# Altium PCB CH32H417QEU-R1.PcbDoc (part 1 of 6)
Units mm, origin at the board's own origin, x right, y up, seen from the top; angles counter-clockwise.
Board outline 125 x 85 mm, 4 copper layers (Top Layer, Layer 1, Layer 2, Bottom Layer), stack 0.603 mm thick; 271 components, 256 nets, 1068 pads, 903 vias.
Unrouted connection lines stored in the file: 143.
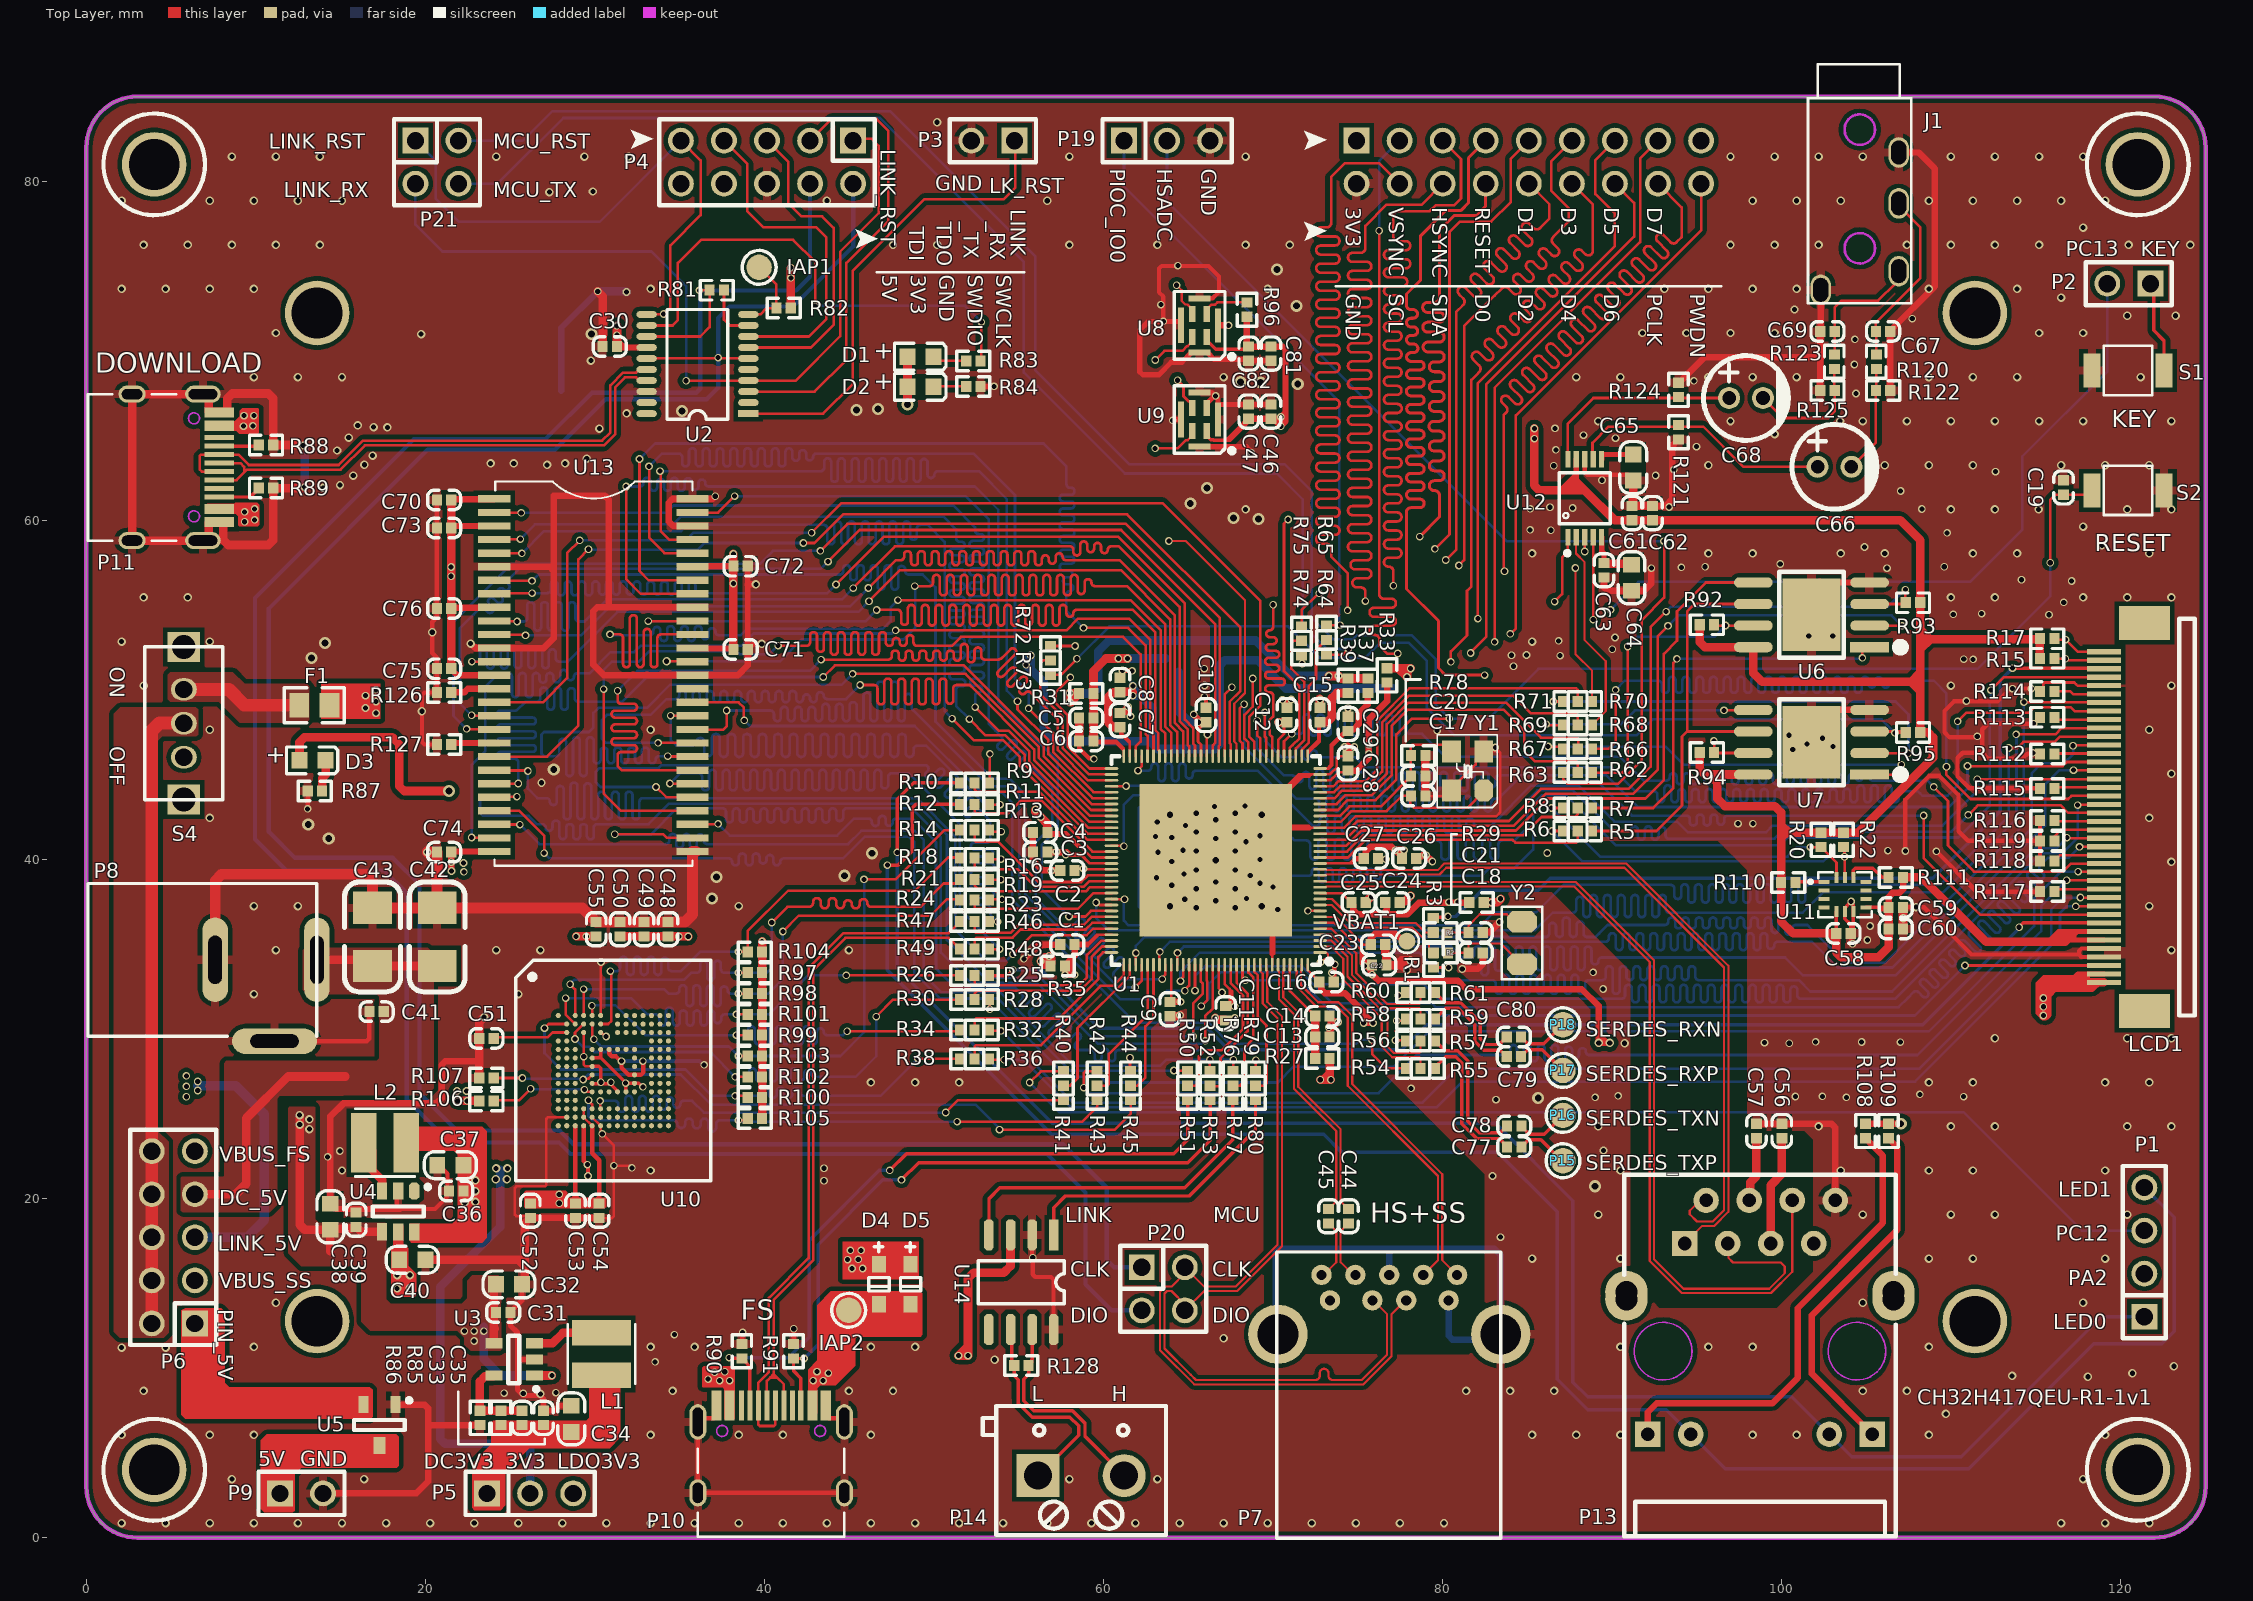
[diagram p0: Top Layer view]
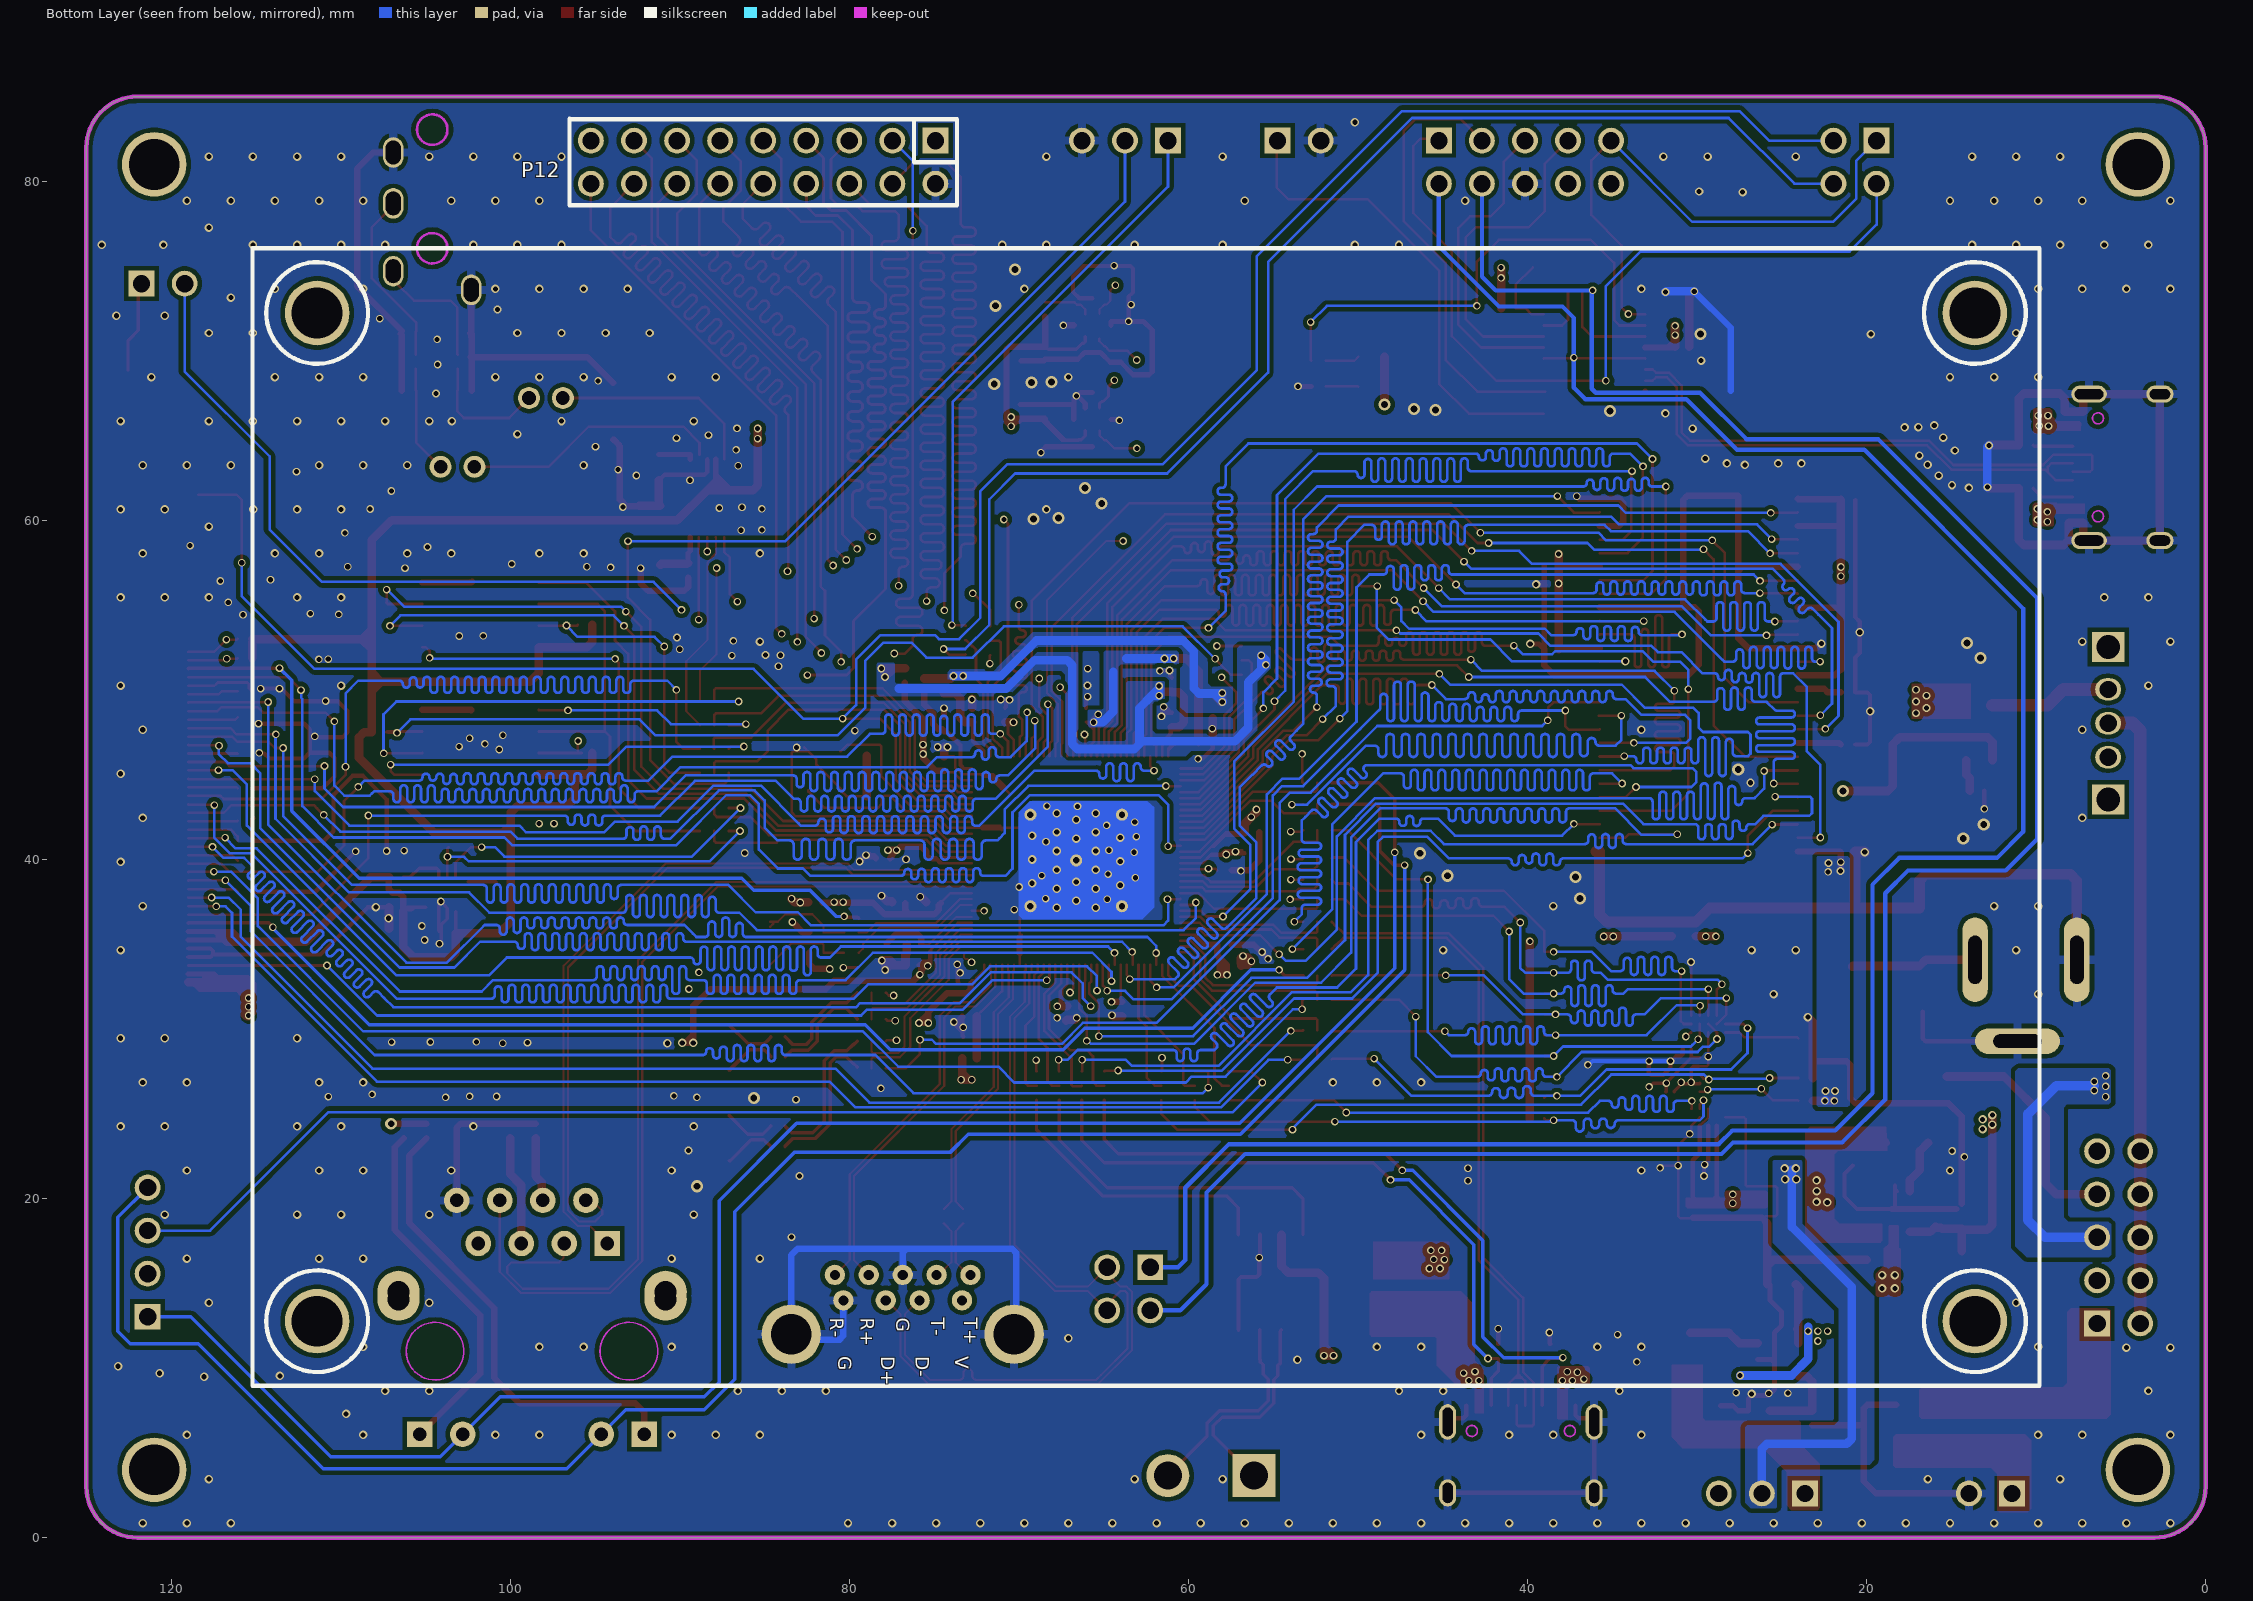
[diagram p1: Bottom Layer view, seen from below]
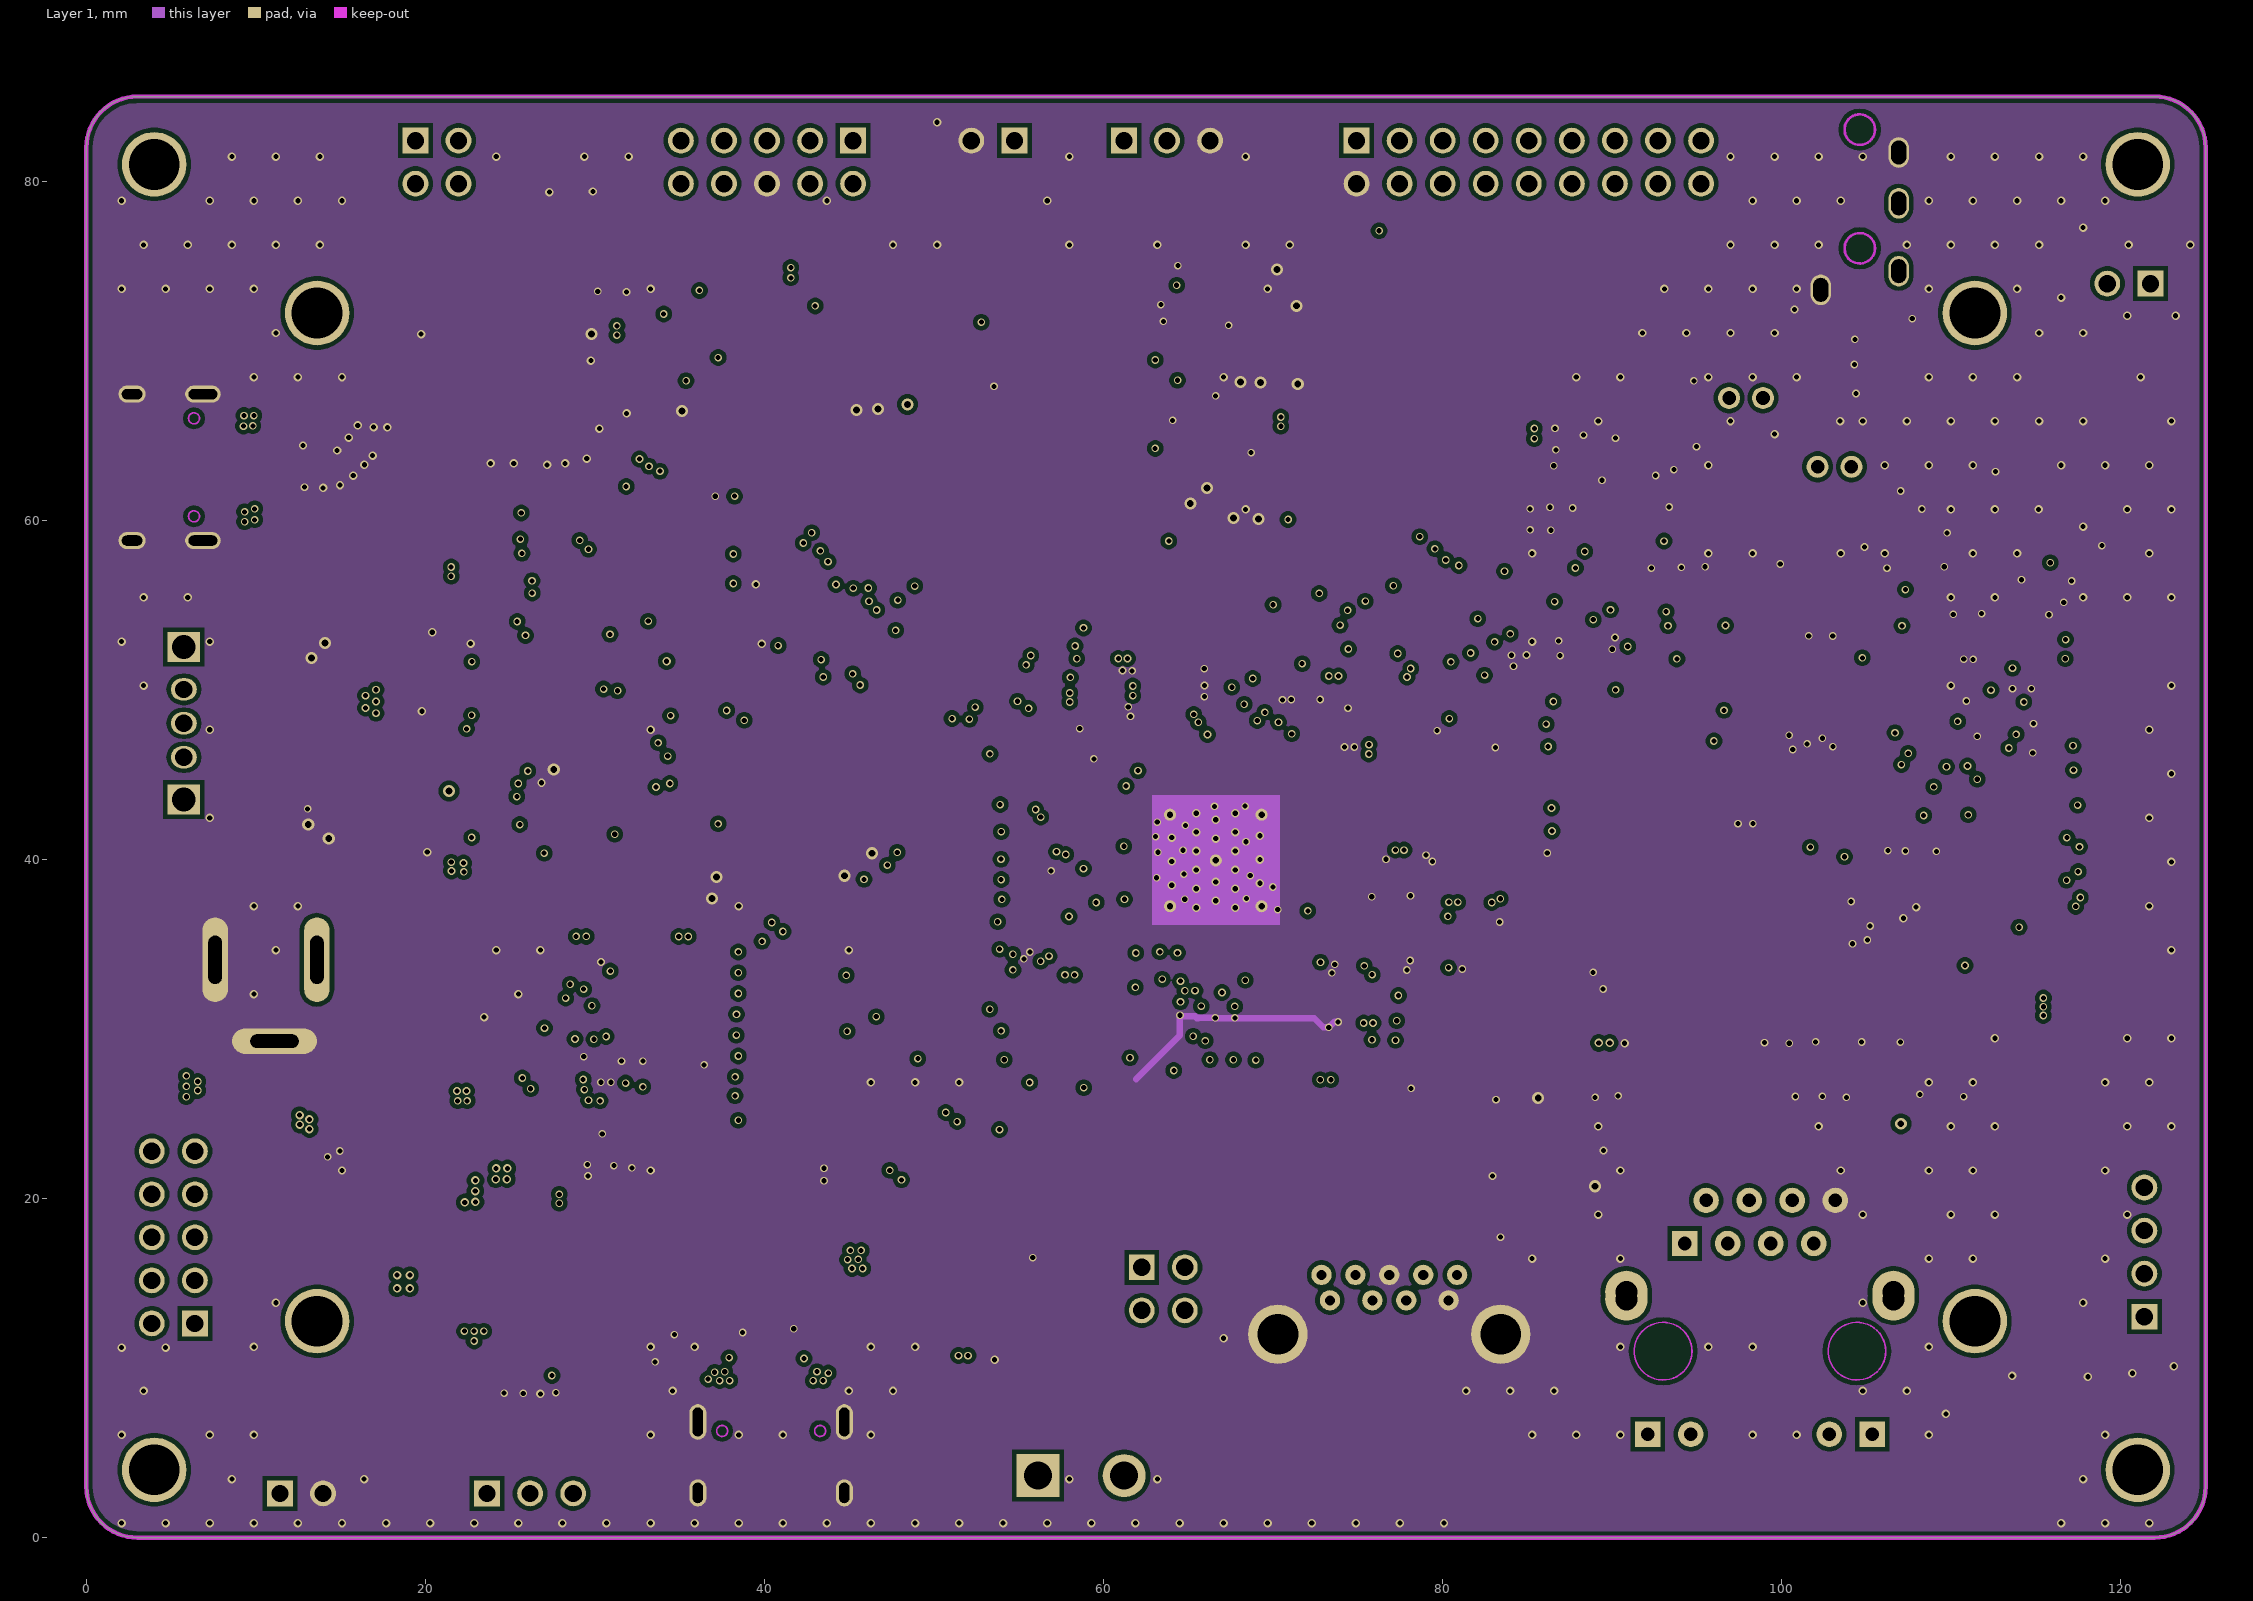
[diagram p2: Layer 1]
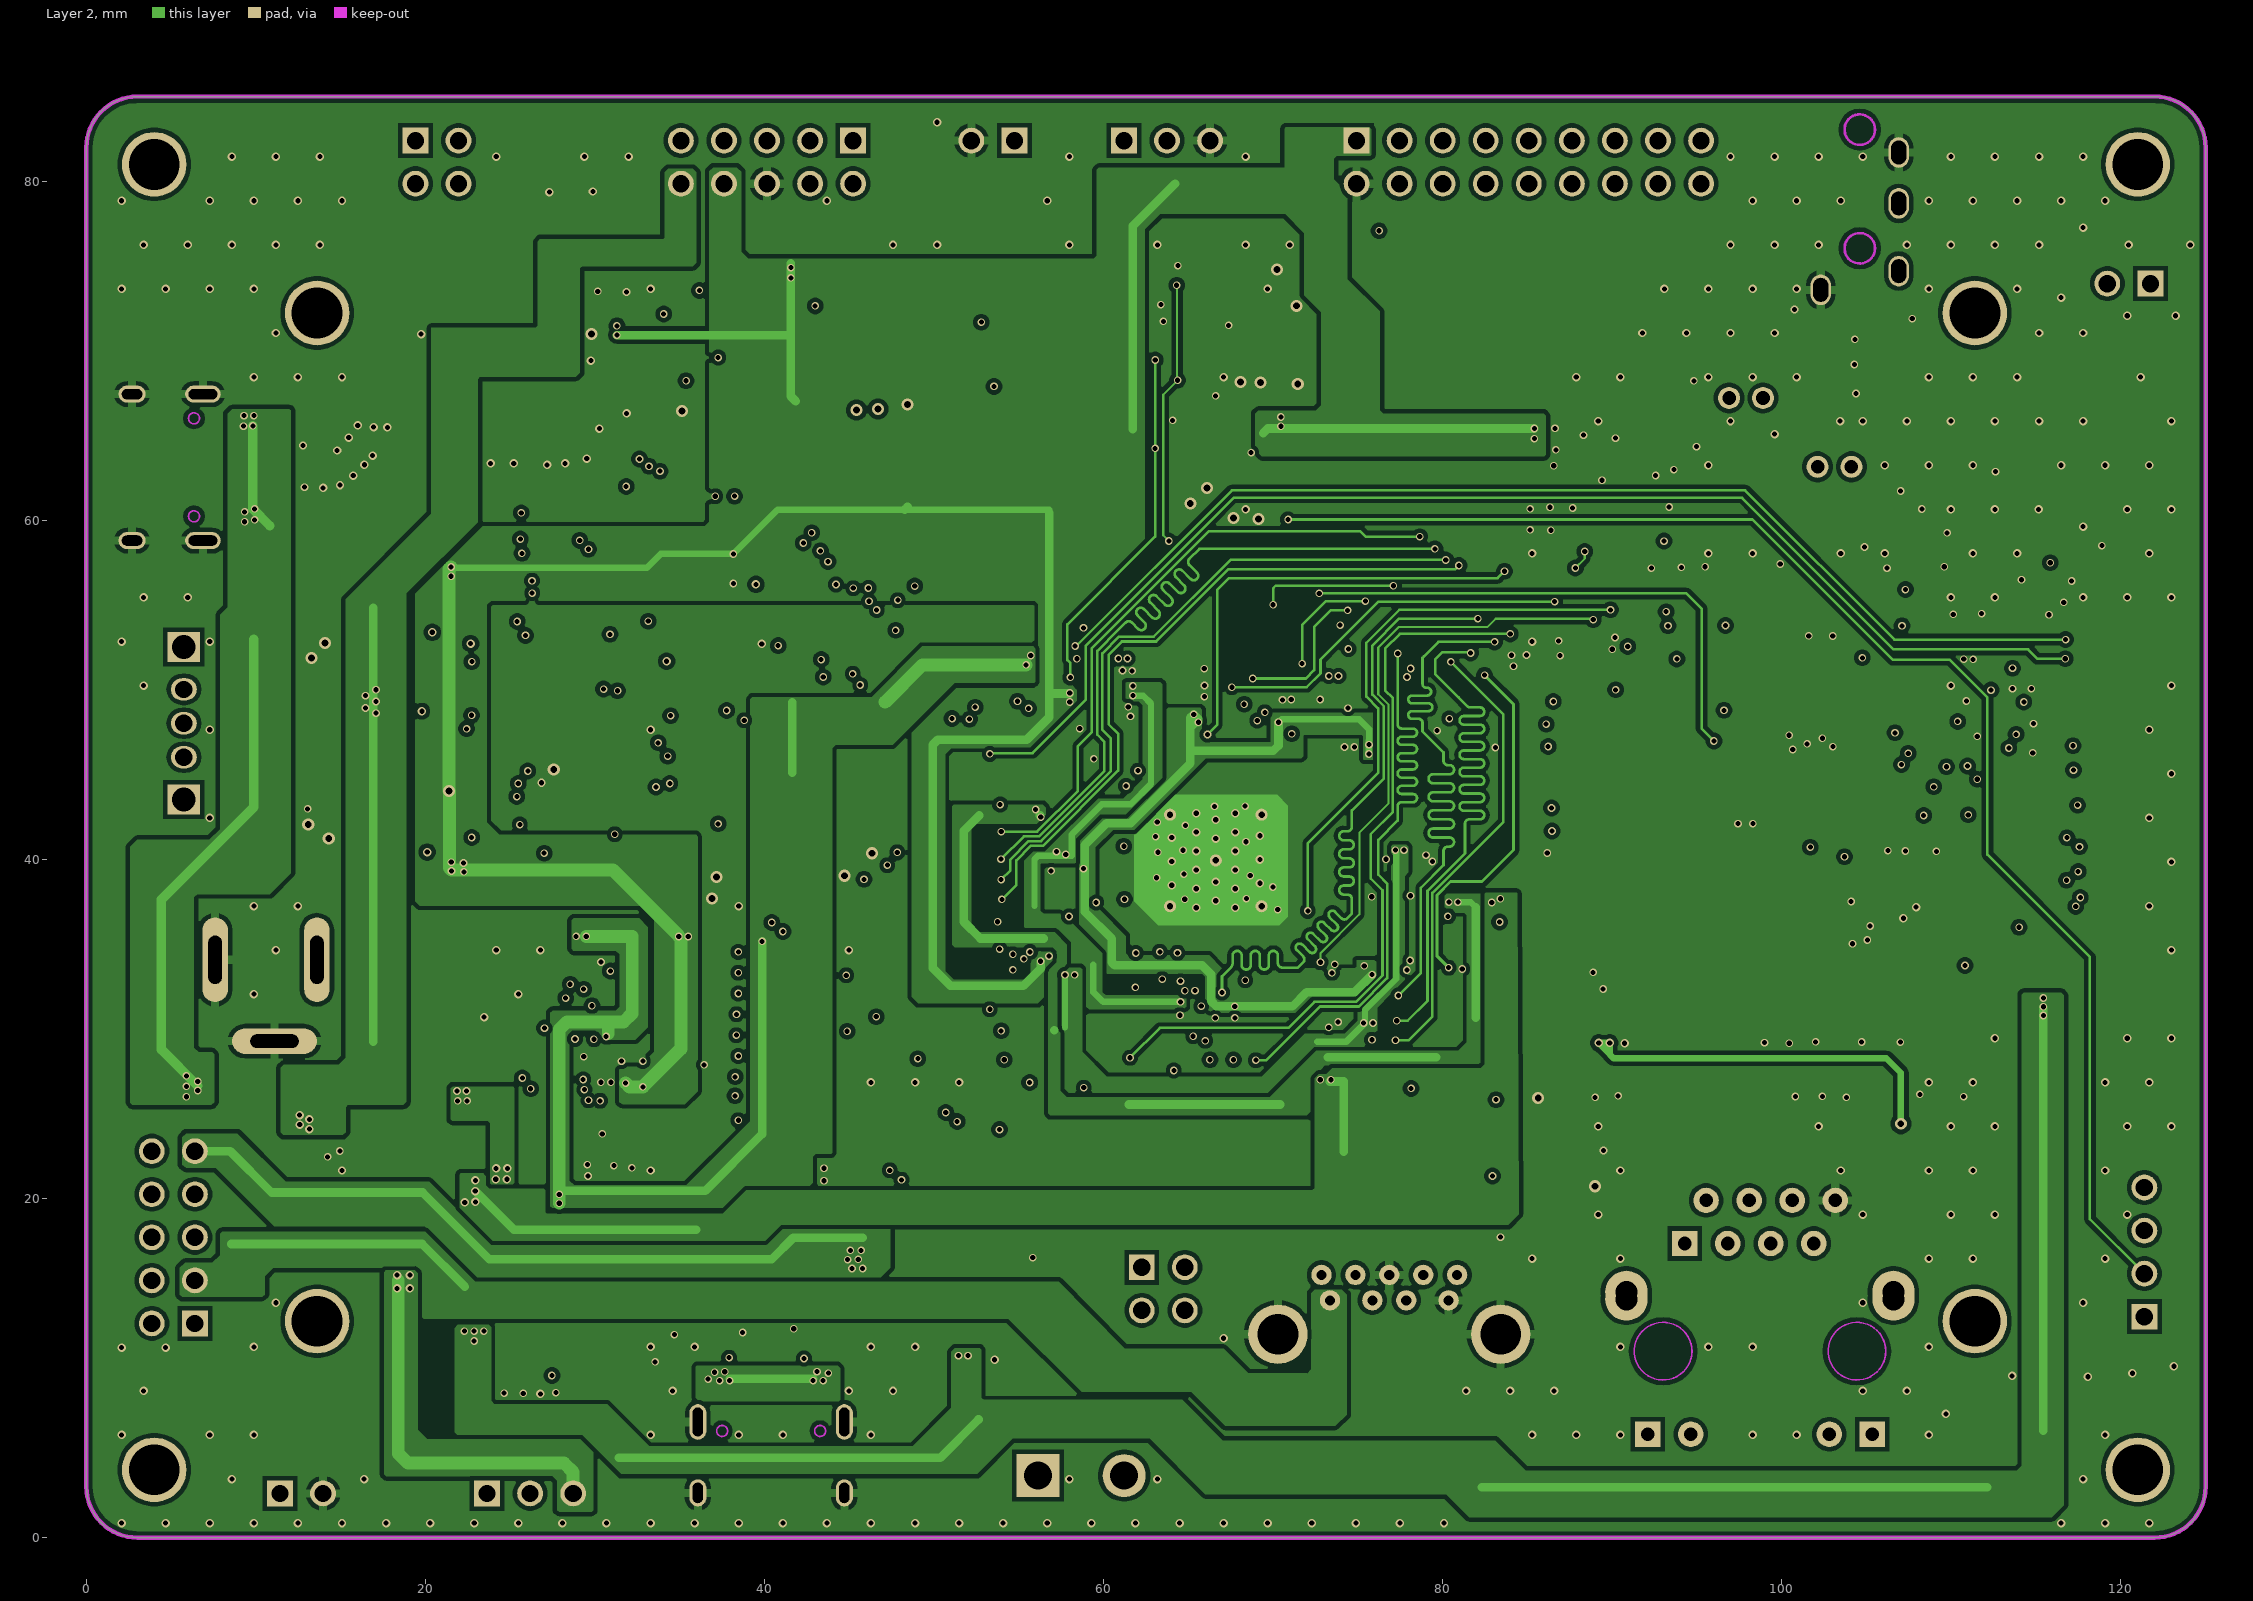
[diagram p3: Layer 2]

## Layer stack, top to bottom
Top Solder: solder mask 0.0102, Solder Resist, Dk 3.5
Top Layer: signal copper 0.0356
Dielectric 2: prepreg 0.0711, PP-006, Dk 4.1
Layer 1: signal copper 0.035
Dielectric 1: dielectric 0.32, FR-4, Dk 4.8
Layer 2: signal copper 0.035
Dielectric 3: prepreg 0.0711, PP-006, Dk 4.1
Bottom Layer: signal copper 0.0356
Bottom Solder: solder mask 0.0102, Solder Resist, Dk 3.5

## Board outline
3,0 cw(c3,3) 0,3 0,82 cw(c3,82) 3,85 122,85 cw(c122,82) 125,82 125,3 cw(c122,3) 122,0

## Design rules (kind name [scope] priority, off if disabled: settings)
Clearance Clearance_1 [InPolygon] p1: gap=0.254 ignorepadtopadclearanceinfootprint=FALSE except(0: Arc-Hole Track-Hole SMDPad-Hole THPad-Hole Via-Hole Fill-Hole Poly-Hole Region-Hole Text-Hole)
Clearance [All] p2: gap=0.127 ignorepadtopadclearanceinfootprint=FALSE except(0: Arc-Hole Track-Hole SMDPad-Hole THPad-Hole Via-Hole Fill-Hole Poly-Hole Region-Hole Text-Hole; 0.152: Arc-THPad Arc-Via Track-THPad Track-Via Via-Fill Via-Poly Via-Region)
ComponentClearance [All] p1 off: gap=0.254 collisioncheckmode=3 verticalgap=0.254 showdistances=FALSE
DiffPairsRouting [All] p1: maxlimit=0.254 minlimit=0.127 mostfreqgap=0.203 toplayer_minwidth=0.102 toplayer_maxwidth=0.381 toplayer_prefwidth=0.203 midlayer1_minwidth=0.102 midlayer1_maxwidth=0.381 midlayer1_prefwidth=0.203 midlayer2_minwidth=0.102 midlayer2_maxwidth=0.381 midlayer2_prefwidth=0.203 bottomlayer_minwidth=0.102 bottomlayer_maxwidth=0.381 bottomlayer_prefwidth=0.203 maxuncoupledlength=12.7
HoleToHoleClearance [All] p1: gap=0.203 allowstackedmicrovias=TRUE
MinimumAnnularRing [All] p1: minimumring=0.07
MinimumSolderMaskSliver [All] p1 off: minsoldermaskwidth=0.254
PlaneConnect [All] p1: planeconnectstyle=Direct reliefexpansion=0.508 reliefentries=4 reliefconductorwidth=0.254 reliefairgap=0.254
PolygonConnect PolygonConnect_2 [InPolygonClass('New Class')] p1: connectstyle=Direct reliefconductorwidth=0.254 reliefentries=4 polygonreliefangle="90 Angle" airgapwidth=0.254
PolygonConnect PolygonConnect_1 [IsVia] p2: connectstyle=Direct reliefconductorwidth=0.254 reliefentries=4 polygonreliefangle="90 Angle" airgapwidth=0.254
PolygonConnect [All] p3: connectstyle=Relief reliefconductorwidth=0.508 reliefentries=4 polygonreliefangle="90 Angle" airgapwidth=0.254
RoutingVias [All] p1: holewidth=0.2 width=0.45 viastyle="Through Hole" minholewidth=0.15 minwidth=0.3 maxholewidth=0.711 maxwidth=1.27
SilkToSilkClearance [All] p1 off: silktosilkclearance=0.254
SilkToSolderMaskClearance [IsPad] p1 off: minsilkscreentomaskgap=0.254 clearancetoexposedcopper=TRUE
SolderMaskExpansion [All] p1: expansion=0.051 istentingtop=FALSE
Width [All] p1: maxlimit=2.54 minlimit=0.102 preferedwidth=0.127
23 further rules are at their usual default settings.

## Classes and differential pairs
component class CAN: P14 R128 U14
component class DFSDM: C46 C47 C81 C82 R96 U8 U9
component class DVP: P12
component class eMMC: C48 C49 C50 C51 C52 C53 C54 C55 R97 R98 R99 R100 R101 R102 R103 R104 R105 R106 R107 U10
component class ETH: C56 C57 P13 R108 R109
component class GPIO_OUT: C77 C78 C79 C80 P15 P16 P17 P18 P19
component class I3C: C58 C59 C60 R110 R111 U11
component class LCD: LCD1 R112 R113 R114 R115 R116 R117 R118 R119
component class Link: C30 D1 D2 IAP1 P3 P4 P20 P21 R81 R82 R83 R84 U2
component class POWER: C31 C32 C33 C34 C35 C36 C37 C38 C39 C40 C41 C42 C43 C44 C45 D3 D4 D5 F1 IAP2 L1 L2 P5 P6 P7 P8 P9 P10 P11 R85 R86 R87 R88 R89 R90 R91 S4 U3 U4 U5
component class QSPI: R92 R93 R94 R95 U6 U7
component class SAI: C61 C62 C63 C64 C65 C66 C67 C68 C69 J1 R120 R121 R122 R123 R124 R125 U12
component class SDRAM: C70 C71 C72 C73 C74 C75 C76 R126 R127 U13
component class U_MCU: C1 C2 C3 C4 C5 C6 C7 C8 C9 C10 C11 C12 C13 C14 C15 C16 C17 C18 C19 C20 C21 C22 C23 C24 C25 C26 C27 C28 C29 P1 P2 R1 R2 R3 R4 R5 R6 R7 R8 R9 R10 R11 R12 R13 R14 R15 R16 R17 R18 R19 R20 R21 R22 R23 R24 R25 R26 R27 R28 R29 R30 R31 R32 R33 R34 R35 R36 R37 R38 R39 R40 R41 R42 R43 R44 R45 R46 R47 R48 R49 R50 R51 R52 R53 R54 R55 R56 R57 R58 R59 R60 R61 R62 R63 R64 R65 R66 R67 R68 R69 R70 R71 R72 R73 R74 R75 R76 R77 R78 R79 R80 S1 S2 U1 VBAT1 Y1 Y2
polygon class "New Class": 1V2 3V3 5V DC_5V GND LDO_3V3 Link_5V NetF1_2 NetP6_2 VBUS_5V VBUS_CC VBUS_FS VDD33 VDDIO VDDK VIO_1.8
differential pair NetC45_NetC44: +NetC45_1 -NetC44_1
differential pair USBSS_TX: +USBSS_TXP -USBSS_TXN
differential pair USBSS_RX: +USBSS_RXN -USBSS_RXP
differential pair NewDifferentialPair1: +DIO -CLK
differential pair MDIR: +MDIRP -MDIRN
differential pair MDIT: +MDITN -MDITP
differential pair USB: +USB_P -USB_N
differential pair OTG_FS_D: +OTG_FS_DM -OTG_FS_DP

## Components (designator, comment, footprint, x,y, rotation, side; value= is the part's Value field where it differs from the comment)
C1 "0.1uF" 0402_C 58.288,34.977 r270 top
C2 "0.1uF" 0402_C 58.288,39.352 r270 top
C3 "0.1uF" 0402_C 56.682,40.433 r270 top
C4 "0.1uF" 0402_C 56.682,41.603 r270 top
C5 "10uF" 0402_C 58.554,48.34 r90 top
C6 "0.1uF" 0402_C 59.404,46.987 r270 top
C7 "0.1uF" 0402_C 60.971,47.797 r180 top
C8 "2.2uF" 0402_C 60.971,50.715 r0 top
C9 "0.1uF" 0402_C 63.903,31.598 r0 top
C10 "0.1uF" 0402_C 66.035,48.096 r180 top
C11 "0.1uF" 0402_C 67.204,30.501 r180 top
C12 "0.1uF" 0402_C 70.813,48.946 r0 top
C13 "2.2uF" 0402_C 73.329,29.519 r270 top
C14 "0.1uF" 0402_C 73.329,30.753 r270 top
C15 "0.1uF" 0402_C 72.75,48.946 r0 top
C16 "0.1uF" 0402_C 73.569,32.762 r270 top
C17 "18pF" 0402_C 78.977,43.735 r270 top
C18 "NC(12pF)" 0402_C 81.518,34.494 r90 top
C19 "0.1uF" 0402_C 116.623,62.366 r0 top
C20 "18pF" 0402_C 78.977,44.923 r270 top
C21 "NC(12pF)" 0402_C 81.518,35.695 r90 top
C22 "0.1uF" 0402_C 76.684,33.763 r270 top
C23 "0.1uF" 0402_C 76.608,34.972 r270 top
C24 "0.1uF" 0402_C 77.464,37.469 r270 top
C25 "2.2uF" 0402_C 74.614,37.469 r90 top
C26 "10uF" 0402_C 78.445,40.065 r270 top
C27 "0.1uF" 0402_C 76.191,40.065 r270 top
C28 "0.1uF" 0402_C 74.412,45.24 r180 top
C29 "0.1uF" 0402_C 74.412,48.42 r0 top
C30 "0.1uF" 0402_C 31.299,70.259 r270 top
C31 "NC(0.1uF)" 0402_C 25.007,13.285 r270 top
C32 "NC(10uF)" 0603_C 25.697,14.936 r180 top
C33 "NC(20pF)" 0402_C 25.705,6.633 r180 top
C34 "NC(10uF)" 0603_C 28.603,6.236 r90 top
C35 "NC(0.1uF)" 0402_C 26.952,6.633 r180 top
C36 "0.1uF" 0402_C 21.39,20.444 r90 top
C37 "10uF" 0603_C 20.7,21.968 r0 top
C38 "10uF" 0603_C 14.392,19.697 r270 top
C39 "0.1uF" 0402_C 15.916,19.173 r0 top
C40 "10uF" 0603_C 19.997,16.389 r180 top
C41 "NC(100nF)" 0402_C 16.689,31.024 r90 top
C42 "NC(33uF)" 3528_C 20.69,37.145 r90 top
C43 "NC(33uF)" 3528_C 16.88,37.145 r90 top
C44 "0.1uF" 0402_C 74.435,18.532 r180 top
C45 "0.1uF" 0402_C 73.267,18.532 r180 top
C46 "NC(1uF)" 0402_C 69.869,66.844 r0 top
C47 "NC(100nF)" 0402_C 68.56,66.844 r0 top
C48 "NC(4.7uF)" 0402_C 34.312,36.316 r0 top
C49 "NC(4.7uF)" 0402_C 32.899,35.466 r180 top
C50 "NC(0.1uF)" 0402_C 31.485,35.466 r180 top
C51 "NC(0.1uF)" 0402_C 23.173,29.45 r90 top
C52 "NC(4.7uF)" 0402_C 26.182,18.856 r180 top
C53 "NC(0.1uF)" 0402_C 28.849,19.706 r0 top
C54 "NC(0.1uF)" 0402_C 30.246,19.706 r0 top
C55 "NC(0.1uF)" 0402_C 30.071,35.466 r180 top
C56 "0.1uF" 0402_C 100.002,24.409 r0 top
C57 "0.1uF" 0402_C 98.503,24.409 r0 top
C58 "NC(10nF)" 0402_C 104.067,35.642 r270 top
C59 "NC(100nF)" 0402_C 107.154,37.175 r270 top
C60 "NC(2.2uF)" 0402_C 107.154,35.905 r270 top
C61 "NC(1uF)" 0402_C 91.166,60.858 r0 top
C62 "NC(100nF)" 0402_C 92.374,60.858 r0 top
C63 "NC(100nF)" 0402_C 89.506,56.631 r180 top
C64 "NC(10uF)" 0603_C 91.138,55.849 r90 top
C65 "NC(10uF)" 0603_C 91.242,62.351 r90 top
C66 "NC(3.3uF)" CAP-TH_BD5.0-P2.00-D0.8-FD 103.111,63.162 r0 top
C67 "NC(2.7nF)" 0402_C 106.399,71.153 r270 top
C68 "NC(3.3uF)" CAP-TH_BD5.0-P2.00-D0.8-FD 97.892,67.219 r0 top
C69 "NC(2.7nF)" 0402_C 102.272,71.153 r90 top
C70 "NC(104)" 0402_C 20.674,61.208 r90 top
C71 "NC(104)" 0402_C 39.011,52.394 r270 top
C72 "NC(104)" 0402_C 39.011,57.296 r270 top
C73 "NC(104)" 0402_C 20.674,59.557 r90 top
C74 "NC(104)" 0402_C 20.674,40.431 r90 top
C75 "NC(104)" 0402_C 20.674,51.251 r90 top
C76 "NC(104)" 0402_C 20.674,54.807 r90 top
C77 "NC(0.1uF)" 0402_C 83.793,23.053 r90 top
C78 "NC(0.1uF)" 0402_C 83.793,24.286 r90 top
C79 "NC(0.1uF)" 0402_C 83.776,28.367 r90 top
C80 "NC(0.1uF)" 0402_C 83.776,29.533 r90 top
C81 "NC(1uF)" 0402_C 69.869,69.415 r180 top
C82 "NC(100nF)" 0402_C 68.56,69.415 r180 top
D1 "BLUE" 0603+ 48.431,69.655 r0 top
D2 "RED" 0603+ 48.431,67.875 r0 top
D3 "RED" 0603+ 12.567,45.845 r0 top
D4 "NC(Diode)" SOD-323 46.752,16.125 r270 top
D5 "NC(Diode)" SOD-323 48.621,16.125 r270 top
F1 "1A" 0805 14.339,49.096 r180 top
IAP1 "Testpoint" TESTPOINT1 39.679,74.927 r0 top
IAP2 "VBUS_CC" TESTPOINT1 44.962,13.409 r90 top
J1 "NC(Phone Jack)" 3.5MMEARPHONE 102.3,73.6 r0 top
L1 "NC(2.2uH)" CD32 30.381,10.824 r270 top
L2 "2.2uH" CD32 17.606,23.299 r0 top
LCD1 "NC(LCD_FPCPIN)" FPC40P-0.5-FK750M3 120.201,42.5 r270 top
P1 "HEADER 4" SIP4-2.54mm 121.387,13.03 r180 top
P2 "HEADER 2" SIP2-2.54mm 121.742,73.965 r90 top
P3 "NC(HEADER 2)" SIP2-2.54mm 54.737,82.4 r90 top
P4 "HEADER 5x2" IDC10-2.54mm 35.065,82.4 r270 top
P5 "HEADER 3" SIP3-2.54MM 23.633,2.609 r90 top
P6 "HEADER 5x2" IDC10-2.54mm 6.397,22.793 r180 top
P7 "USB3.0-A" USB3.0-A-Receptacle 73.351,13.995 r0 top
P8 "NC(POWER_JACK）" DC-005 13.595,34.084 r0 top
P9 "NC(Header 2)" SIP2-2.54mm 11.419,2.609 r270 top
P10 "USBFS" TYPE-C-Receptacle-2.0 40.388,7.792 r0 top
P11 "TYPE-C" TYPE-C-Receptacle-2.0 7.846,63.13 r270 top
P12 "NC(HEADER 9x2)" IDC18-2.54MM 74.92,82.4 r270 bottom
P13 "HR911105A" HR911105A 94.268,17.348 r0 top
P14 "NC" PORT2-5.08MM 56.134,3.658 r90 top
P15 "SERDES_TXP" TESTPOINT1 87.095,22.229 r0 top
P16 "SERDES_TXN" TESTPOINT1 87.095,24.903 r0 top
P17 "SERDES_RXP" TESTPOINT1 87.095,27.555 r0 top
P18 "SERDES_RXN" TESTPOINT1 87.095,30.25 r0 top
P19 "NC(HEADER 3)" SIP3-2.54MM 61.2,82.4 r90 top
P20 "HEADER 2x2" IDC4-2.54MM 62.25,15.946 r0 top
P21 "HEADER 2x2" IDC4-2.54MM 19.409,82.4 r0 top
R1 "NC(0Ω)" 0402 79.461,33.644 r90 top
R2 "NC(0Ω)" 0402 80.311,34.494 r180 top
R3 "NC(0Ω)" 0402 79.443,36.545 r270 top
R4 "NC(0Ω)" 0402 80.293,35.695 r180 top
R5 "NC(0Ω)" 0402 88.814,41.678 r180 top
R6 "NC(0Ω)" 0402 87.114,41.678 r0 top
R7 "NC(0Ω)" 0402 88.814,43.035 r180 top
R8 "NC(0Ω)" 0402 87.114,43.035 r0 top
R9 "NC(0Ω)" 0402 53.237,44.519 r180 top
R10 "NC(0Ω)" 0402 51.537,44.519 r0 top
R11 "NC(0Ω)" 0402 53.237,43.249 r180 top
R12 "NC(0Ω)" 0402 51.537,43.249 r0 top
R13 "NC(0Ω)" 0402 53.237,41.725 r180 top
R14 "NC(0Ω)" 0402 51.537,41.725 r0 top
R15 "4.7K" 0402 116.078,51.867 r180 top
R16 "NC(0Ω)" 0402 53.237,40.074 r180 top
R17 "4.7K" 0402 115.228,53.021 r0 top
R18 "NC(0Ω)" 0402 51.537,40.074 r0 top
R19 "NC(0Ω)" 0402 53.237,38.829 r180 top
R20 "NC(4.7K)" 0402 102.317,40.728 r90 top
R21 "NC(0Ω)" 0402 51.537,38.829 r0 top
R22 "NC(4.7K)" 0402 103.638,41.578 r270 top
R23 "NC(0Ω)" 0402 53.237,37.62 r180 top
R24 "NC(0Ω)" 0402 51.537,37.62 r0 top
R25 "NC(0Ω)" 0402 53.237,33.148 r180 top
R26 "NC(0Ω)" 0402 51.537,33.148 r0 top
R27 "0Ω" 0402 72.479,28.271 r0 top
R28 "NC(0Ω)" 0402 53.237,31.735 r180 top
R29 "0Ω" 0402 81.572,37.469 r0 top
R30 "NC(0Ω)" 0402 51.537,31.735 r0 top
R31 "0Ω" 0402 59.404,49.791 r180 top
R32 "NC(0Ω)" 0402 53.237,29.932 r180 top
R33 "NC(0Ω)" 0402 76.718,51.281 r270 top
R34 "NC(0Ω)" 0402 51.537,29.932 r0 top
R35 "0Ω" 0402 57.723,33.726 r180 top
R36 "NC(0Ω)" 0402 53.237,28.221 r180 top
R37 "0Ω" 0402 75.582,49.822 r90 top
R38 "NC(0Ω)" 0402 51.537,28.221 r0 top
R39 "0Ω" 0402 74.412,49.822 r90 top
R40 "NC(0Ω)" 0402 57.632,27.507 r270 top
R41 "NC(0Ω)" 0402 57.632,25.807 r90 top
R42 "NC(0Ω)" 0402 59.613,27.507 r270 top
R43 "NC(0Ω)" 0402 59.613,25.807 r90 top
R44 "NC(0Ω)" 0402 61.594,27.507 r270 top
R45 "NC(0Ω)" 0402 61.594,25.807 r90 top
R46 "NC(0Ω)" 0402 53.237,36.334 r180 top
R47 "NC(0Ω)" 0402 51.537,36.334 r0 top
R48 "NC(0Ω)" 0402 53.237,34.705 r180 top
R49 "NC(0Ω)" 0402 51.537,34.705 r0 top
R50 "NC(0Ω)" 0402 64.953,27.507 r270 top
R51 "NC(0Ω)" 0402 64.953,25.807 r90 top
R52 "NC(0Ω)" 0402 66.288,27.507 r270 top
R53 "NC(0Ω)" 0402 66.288,25.807 r90 top
R54 "NC(0Ω)" 0402 77.844,27.674 r0 top
R55 "NC(0Ω)" 0402 79.544,27.674 r180 top
R56 "NC(0Ω)" 0402 77.844,29.282 r0 top
R57 "NC(0Ω)" 0402 79.544,29.282 r180 top
R58 "NC(0Ω)" 0402 77.844,30.578 r0 top
R59 "NC(0Ω)" 0402 79.544,30.578 r180 top
R60 "NC(0Ω)" 0402 77.844,32.147 r0 top
R61 "NC(0Ω)" 0402 79.544,32.147 r180 top
R62 "NC(0Ω)" 0402 88.814,45.127 r180 top
R63 "NC(0Ω)" 0402 87.114,45.127 r0 top
R64 "NC(0Ω)" 0402 73.147,52.091 r90 top
R65 "NC(0Ω)" 0402 73.147,53.791 r270 top
R66 "NC(0Ω)" 0402 88.814,46.524 r180 top
R67 "NC(0Ω)" 0402 87.114,46.524 r0 top
R68 "NC(0Ω)" 0402 88.814,47.921 r180 top
R69 "NC(0Ω)" 0402 87.114,47.921 r0 top
R70 "NC(0Ω)" 0402 88.814,49.318 r180 top
R71 "NC(0Ω)" 0402 87.114,49.318 r0 top
R72 "NC(0Ω)" 0402 56.863,52.595 r270 top
R73 "NC(0Ω)" 0402 56.863,50.895 r90 top
R74 "NC(0Ω)" 0402 71.683,52.047 r90 top
R75 "NC(0Ω)" 0402 71.683,53.747 r270 top
R76 "NC(0Ω)" 0402 67.623,27.507 r270 top
R77 "NC(0Ω)" 0402 67.623,25.807 r90 top
R78 "100K(NC)" 0402 78.977,46.128 r180 top
R79 "NC(0Ω)" 0402 68.958,27.507 r270 top
R80 "NC(0Ω)" 0402 68.958,25.807 r90 top
R81 "1K" 0402 36.757,73.578 r0 top
R82 "10K" 0402 40.699,72.519 r0 top
R83 "1K" 0402 52.744,69.408 r180 top
R84 "1K" 0402 52.744,67.903 r180 top
R85 "NC(10K)" 0402 24.457,6.633 r90 top
R86 "NC(2.2K)" 0402 23.209,6.633 r90 top
R87 "1K" 0402 13.902,44.046 r180 top
R88 "NC(5.1K)" 0402 10.168,64.445 r0 top
R89 "NC(5.1K)" 0402 10.168,61.905 r0 top
R90 "NC(5.1K)" 0402 38.659,10.566 r90 top
R91 "NC(5.1K)" 0402 41.707,10.566 r90 top
R92 "NC(10K)" 0402 95.162,53.845 r0 top
R93 "NC(10K)" 0402 107.315,55.143 r0 top
R94 "NC(10K)" 0402 95.162,46.304 r0 top
R95 "NC(10K)" 0402 107.315,47.498 r0 top
R96 "NC(10K)" 0402 68.453,72.859 r270 top
R97 "NC(10K)" 0402 39.005,33.32 r0 top
R98 "NC(10K)" 0402 39.005,32.091 r0 top
R99 "NC(10K)" 0402 39.005,29.634 r0 top
R100 "NC(10K)" 0402 39.005,25.949 r0 top
R101 "NC(10K)" 0402 39.005,30.863 r0 top
R102 "NC(10K)" 0402 39.005,27.178 r0 top
R103 "NC(10K)" 0402 39.005,28.406 r0 top
R104 "NC(10K)" 0402 39.005,34.548 r0 top
R105 "NC(10K)" 0402 39.005,24.721 r0 top
R106 "NC(10K)" 0402 24.023,25.761 r180 top
R107 "NC(10K)" 0402 24.023,27.111 r180 top
R108 "1K" 0402 104.938,24.409 r270 top
R109 "1K" 0402 106.288,24.409 r270 top
R110 "NC(10K)" 0402 99.962,38.635 r0 top
R111 "NC(10K)" 0402 107.154,38.944 r180 top
R112 "NC(10K)" 0402 116.078,46.228 r180 top
R113 "NC(10K)" 0402 116.078,48.387 r180 top
R114 "NC(10K)" 0402 116.078,49.911 r180 top
R115 "NC(10K)" 0402 116.078,44.196 r180 top
R116 "NC(10K)" 0402 116.078,42.291 r180 top
R117 "NC(10K)" 0402 116.078,38.1 r180 top
R118 "NC(10K)" 0402 116.078,39.903 r180 top
R119 "NC(10K)" 0402 116.078,41.097 r180 top
R120 "NC(470Ω)" 0402 105.574,68.933 r90 top
R121 "NC(270K)" 0402 93.914,65.619 r270 top
R122 "NC(10K)" 0402 105.549,67.651 r0 top
R123 "NC(470Ω)" 0402 103.097,68.933 r90 top
R124 "NC(270K)" 0402 93.914,67.272 r90 top
R125 "NC(10K)" 0402 103.122,67.651 r180 top
R126 "NC(10K)" 0402 20.674,49.854 r0 top
R127 "NC(10K)" 0402 21.524,46.781 r180 top
R128 "NC(240)" 0402 55.575,10.16 r180 top
S1 "KEY" 贴片按键 122.547,68.843 r180 top
S2 "RESET" 贴片按键 118.305,61.767 r0 top
S4 "SW-SPDT" SW1 5.747,48.032 r270 top
U1 "CH32H417QEU6" QFN128_12.3X12.3 66.616,39.942 r90 top
U2 "CH32V305F" TSSOP20 39.041,66.298 r90 top
U3 "NC（DC-DC: 5V to 3.3V）" SOT-23-5 26.431,9.559 r90 top
U4 "CH2003V" SOT-23-6 19.34,20.433 r180 top
U5 "CH213" SOT-23-3 18.236,7.841 r180 top
U6 "NC(QSPI_FLASH)" SOIC-8_208MIL 101.752,54.432 r90 top
U7 "NC(QSPI_FLASH)" SOIC-8_208MIL 101.752,46.914 r90 top
U8 "NC(MP34DT06JTR)" MIC-MP34DT06J-L3.0-W4.0-P0.85-1.35-BL 65.659,71.501 r0 top
U9 "NC(MP34DT06JTR)" MIC-MP34DT06J-L3.0-W4.0-P0.85-1.35-BL 65.659,65.953 r0 top
U10 "NC(eMMC card)" WFBGA-153-11.5x13x0.8mm 27.833,30.794 r0 top
U11 "NC(ICM-42688-P)" LGA-14_L3.0-W2.5-P0.50-TL 103.728,37.924 r0 top
U12 "NC(4344-DAC)" TSSOP-10_L3.0-W3.0-P0.50-LS4.9-BL 88.379,61.307 r90 top
U13 "NC(SDRAM)" TSOP-54 24.064,61.27 r90 top
U14 "NC(TJA1050)" SOP8 57.048,17.856 r180 top
VBAT1 "Testpoint" TESTPOINT2 77.893,35.181 r180 top
Y1 "25M" XT3225 82.418,44.077 r90 top
Y2 "NC(32.768k)" FC-135 84.678,33.823 r90 top
? "Comment" HOLE 121,4 r0 top
? "Comment" HOLE 121,81 r0 top
? "Comment" HOLE 4,81 r0 top
? "Comment" HOLE 4,4 r0 top
? "" HOLE 13.61,12.765 r180 bottom locked
? "Comment" HOLE 13.61,72.235 r180 bottom locked
? "Comment" HOLE 111.39,72.235 r180 bottom locked
? "Comment" HOLE 111.39,12.765 r180 bottom locked

## Footprints (in the part's own frame and the unit in brackets; to place one, negate y for a bottom-side part, rotate by r counter-clockwise, add the part's x,y. Pads: shape width x height; smd on the part's side, far side on the other; paste and mask are expansions set on the pad)
3.5MMEARPHONE [mm]
  oval 1.2x1.8 hole 0.9 slot 1.4 at 90 deg: 1(0,0) 2(4.6,1.1) 3(4.6,5.1) 4(4.6,8.1)
  Keep-Out Layer circle w0.152: c2.3,2.45 r0.9
  Keep-Out Layer circle w0.152: c2.3,9.45 r0.9
  silkscreen extent -0.75,-0.8 5.35,13.3
0402 [mm]
  rect 0.6x0.65 smd mask+0.051: 1(0,0) 2(0.85,0)
  silkscreen extent -0.55,-0.58 1.4,0.57
0402_C [mm]
  rect 0.65x0.6 smd mask+0.051: 1(0,0) 2(0,-0.85)
  silkscreen extent -0.58,-1.4 0.57,0.55
0603+ [mm]
  rect 0.93x0.98 smd: 1(0,0) 2(1.54,0)
  silkscreen extent -0.76,-0.79 2.27,0.79
0603_C [mm]
  rect 0.93x0.98 smd mask+0.051: 1(0,0) 2(1.54,0)
  silkscreen extent -0.76,-0.79 2.31,0.79
0805 [mm]
  rect 1.16x1.47 smd: 1(0,0) 2(1.78,0)
  silkscreen extent -0.88,-1.04 2.66,1.03
3528_C [mil]
  rect 75x90 smd: 1(0,0) 2(-135,0)
  silkscreen extent -195,-65 60,65
CAP-TH_BD5.0-P2.00-D0.8-FD [mm]
  round 1.3 hole 0.8 paste+0 mask+0.051: 1(-1,0) 2(1,0)
  silkscreen extent -2.5,-2.5 2.5,2.5
CD32 [mm]
  rect 1.5x3.5 smd: 1(-1.25,0) 2(1.25,0)
  silkscreen extent -1.75,-2 1.75,2
DC-005 [mm]
  oval 1.5x5 hole 0.8 slot 2.85 at 90 deg: 1(0,0) 2(-6,0)
  oval 5x1.5 hole 0.8 slot 2.85 at 0 deg: 3(-2.5,-4.8)
  silkscreen extent -13.5,-4.5 0,4.5
FC-135 [mil]
  oct 50x70 smd: 1(0,0) 2(98.43,0)
  silkscreen extent -35,-47 133,47
FPC40P-0.5-FK750M3 [mm]
  rect 2x3 smd: 0(-11.436,1.202) 0(11.436,1.202)
  rect 0.3x2 smd: 1(9.75,-1.202) 2(9.25,-1.202) 3(8.75,-1.202) 4(8.25,-1.202) 5(7.75,-1.202) 6(7.25,-1.202) 7(6.75,-1.202) 8(6.25,-1.202) 9(5.75,-1.202) 10(5.25,-1.202) 11(4.75,-1.202) 12(4.25,-1.202) 13(3.75,-1.202) 14(3.25,-1.202) 15(2.75,-1.202) 16(2.25,-1.202) 17(1.75,-1.202) 18(1.25,-1.202) 19(0.75,-1.202) 20(0.25,-1.202) 21(-0.25,-1.202) 22(-0.75,-1.202) 23(-1.25,-1.202) 24(-1.75,-1.202) 25(-2.25,-1.202) 26(-2.75,-1.202) 27(-3.25,-1.202) 28(-3.75,-1.202) 29(-4.25,-1.202) 30(-4.75,-1.202) 31(-5.25,-1.202) 32(-5.75,-1.202) 33(-6.25,-1.202) 34(-6.75,-1.202) 35(-7.25,-1.202) 36(-7.75,-1.202) 37(-8.25,-1.202) 38(-8.75,-1.202) 39(-9.25,-1.202) 40(-9.75,-1.202)
  silkscreen extent -11.7,3.24 11.7,4.17, body extent -12.2,-1.75 12.2,4.55, height 2
HOLE [mm]
  round 3.81 hole 3: 0(0,0)
  silkscreen extent -3,-3 3,3
HR911105A [mm]
  rect 1.5x1.5 hole 0.8: 1(0,0) 9(-2.175,-11.252) 12(11.075,-11.252)
  round 1.5 hole 0.8: 2(1.27,2.54) 3(2.54,0) 4(3.81,2.54) 5(5.08,0) 6(6.35,2.54) 7(7.62,0) 8(8.89,2.54) 10(0.365,-11.252) 11(8.535,-11.252)
  round 2.5 hole 1.3: ""(-3.43,-2.852) ""(-3.43,-3.3) ""(12.32,-3.3) ""(12.32,-2.852)
  Keep-Out Layer circle w0.1: c10.165,-6.352 r1.7
  Keep-Out Layer circle w0.1: c-1.265,-6.352 r1.7
  silkscreen extent -3.55,-17.27 12.45,4.06
IDC4-2.54MM [mil]
  rect 60x60 hole 40: 1(0,0)
  round 60 hole 40: 2(100,0) 3(0,-100) 4(100,-100)
  silkscreen extent -50,-150 150,50
IDC10-2.54mm [mil]
  rect 60x60 hole 40: 1(0,400)
  round 60 hole 40: 2(100,400) 3(0,300) 4(100,300) 5(0,200) 6(100,200) 7(0,100) 8(100,100) 9(0,0) 10(100,0)
  silkscreen extent -50,-50 150,450
IDC18-2.54MM [mil]
  rect 60x60 hole 40: 1(0,0)
  round 60 hole 40: 2(100,0) 3(0,-100) 4(100,-100) 5(0,-200) 6(100,-200) 7(0,-300) 8(100,-300) 9(0,-400) 10(100,-400) 11(0,-500) 12(100,-500) 13(0,-600) 14(100,-600) 15(0,-700) 16(100,-700) 17(0,-800) 18(100,-800)
  silkscreen extent -51,-850 150,50
LGA-14_L3.0-W2.5-P0.50-TL [mm]
  rect 0.65x0.25 smd: 1(-1.25,0.75) 2(-1.25,0.25) 3(-1.25,-0.25) 4(-1.25,-0.75) 8(1.25,-0.75) 9(1.25,-0.25) 10(1.25,0.25) 11(1.25,0.75)
  rect 0.25x0.65 smd: 5(-0.5,-1) 6(0,-1) 7(0.5,-1) 12(0.5,1) 13(0,1) 14(-0.5,1)
  silkscreen extent -2.13,-1.33 1.58,1.33
MIC-MP34DT06J-L3.0-W4.0-P0.85-1.35-BL [mm]
  rect 0.4x0.95 smd mask+0.05: 1(0.425,-0.675) 2(0.425,0.675) 3(-0.425,0.675) 4(-0.425,-0.675)
  rect 0.35x2.1 smd mask+0: 5(-1.1,0)
  rect 1.3x0.35 smd mask+0: 5(0,-1.6) 5(0,1.6)
  rect 0.35x2 smd mask+0: 5(1.1,0)
  silkscreen extent -1.5,-2 2.03,2
PORT2-5.08MM [mil]
  rect 100x100 hole 65: 1(0,0)
  round 100 hole 65: 2(0,-200)
  silkscreen extent -138,-297 161,128
QFN128_12.3X12.3 [mm]
  round 0.711 hole 0.381 mask+0.051: 0(-2.7,-2.7) 0(-2.7,2.7) 0(0,0) 0(2.7,-2.7) 0(2.7,2.7)
  rect 9x9 smd mask+0.051: 0(0,0)
  oval 0.16x0.8 smd mask+0.051: 1(-5.425,-6.15) 2(-5.075,-6.15) 3(-4.725,-6.15) 4(-4.375,-6.15) 5(-4.025,-6.15) 6(-3.675,-6.15) 7(-3.325,-6.15) 8(-2.975,-6.15) 9(-2.625,-6.15) 10(-2.275,-6.15) 11(-1.925,-6.15) 12(-1.575,-6.15) 13(-1.225,-6.15) 14(-0.875,-6.15) 15(-0.525,-6.15) 16(-0.175,-6.15) 17(0.175,-6.15) 18(0.525,-6.15) 19(0.875,-6.15) 20(1.225,-6.15) 21(1.575,-6.15) 22(1.925,-6.15) 23(2.275,-6.15) 24(2.625,-6.15) 25(2.975,-6.15) 26(3.325,-6.15) 27(3.675,-6.15) 28(4.025,-6.15) 29(4.375,-6.15) 30(4.725,-6.15) 31(5.075,-6.15) 32(5.425,-6.15) 65(5.425,6.15) 66(5.075,6.15) 67(4.725,6.15) 68(4.375,6.15) 69(4.025,6.15) 70(3.675,6.15) 71(3.325,6.15) 72(2.975,6.15) 73(2.625,6.15) 74(2.275,6.15) 75(1.925,6.15) 76(1.575,6.15) 77(1.225,6.15) 78(0.875,6.15) 79(0.525,6.15) 80(0.175,6.15) 81(-0.175,6.15) 82(-0.525,6.15) 83(-0.875,6.15) 84(-1.225,6.15) 85(-1.575,6.15) 86(-1.925,6.15) 87(-2.275,6.15) 88(-2.625,6.15) 89(-2.975,6.15) 90(-3.325,6.15) 91(-3.675,6.15) 92(-4.025,6.15) 93(-4.375,6.15) 94(-4.725,6.15) 95(-5.075,6.15) 96(-5.425,6.15)
  oval 0.8x0.16 smd mask+0.051: 33(6.15,-5.425) 34(6.15,-5.075) 35(6.15,-4.725) 36(6.15,-4.375) 37(6.15,-4.025) 38(6.15,-3.675) 39(6.15,-3.325) 40(6.15,-2.975) 41(6.15,-2.625) 42(6.15,-2.275) 43(6.15,-1.925) 44(6.15,-1.575) 45(6.15,-1.225) 46(6.15,-0.875) 47(6.15,-0.525) 48(6.15,-0.175) 49(6.15,0.175) 50(6.15,0.525) 51(6.15,0.875) 52(6.15,1.225) 53(6.15,1.575) 54(6.15,1.925) 55(6.15,2.275) 56(6.15,2.625) 57(6.15,2.975) 58(6.15,3.325) 59(6.15,3.675) 60(6.15,4.025) 61(6.15,4.375) 62(6.15,4.725) 63(6.15,5.075) 64(6.15,5.425) 97(-6.15,5.425) 98(-6.15,5.075) 99(-6.15,4.725) 100(-6.15,4.375) 101(-6.15,4.025) 102(-6.15,3.675) 103(-6.15,3.325) 104(-6.15,2.975) 105(-6.15,2.625) 106(-6.15,2.275) 107(-6.15,1.925) 108(-6.15,1.575) 109(-6.15,1.225) 110(-6.15,0.875) 111(-6.15,0.525) 112(-6.15,0.175) 113(-6.15,-0.175) 114(-6.15,-0.525) 115(-6.15,-0.875) 116(-6.15,-1.225) 117(-6.15,-1.575) 118(-6.15,-1.925) 119(-6.15,-2.275) 120(-6.15,-2.625) 121(-6.15,-2.975) 122(-6.15,-3.325) 123(-6.15,-3.675) 124(-6.15,-4.025) 125(-6.15,-4.375) 126(-6.15,-4.725) 127(-6.15,-5.075) 128(-6.15,-5.425)
  silkscreen extent -6.15,-6.84 6.15,6.15
SIP2-2.54mm [mil]
  rect 60x60 hole 40: 1(0,0)
  round 60 hole 40: 2(0,100)
  silkscreen extent -50,-50 50,150
SIP3-2.54MM [mil]
  rect 60x60 hole 40: 1(0,0)
  round 60 hole 40: 2(0,-100) 3(0,-200)
  silkscreen extent -50,-250 50,50
SIP4-2.54mm [mil]
  rect 60x60 hole 40: 1(0,0)
  round 60 hole 40: 2(0,-100) 3(0,-200) 4(0,-300)
  silkscreen extent -50,-350 50,50
SOD-323 [mm]
  rect 1x0.83 smd: 1(0,0) 2(2.36,0)
  silkscreen extent -1.28,-0.6 1.58,0.6
SOIC-8_208MIL [mil]
  rect 169.29x133.86 smd: 0(0,0)
  rect 24x90 smd: 1(-75,-135)
  oval 24x90 smd: 2(-25,-135) 3(25,-135) 4(75,-135) 5(75,135) 6(25,135) 7(-25,135) 8(-75,135)
  silkscreen extent -100,-216 100,75
SOP8 [mil]
  rect 22x72 smd: 1(0,0)
  oct 22x72 smd: 2(50,0) 3(100,0) 4(150,0) 5(150,220) 6(100,220) 7(50,220) 8(0,220)
  silkscreen extent -25,60 175,160
SOT-23-3 [mm] "SOT-23-3"
  rect 0.6x1 smd: 1(0,0) 2(1.9,0)
  rect 0.7x1 smd: 3(0.95,2.4)
  silkscreen extent -0.93,-0.38 2.45,1.49
SOT-23-5 [mm]
  rect 0.6x1 smd: 1(0,0) 2(0.95,0) 3(1.9,0) 4(1.9,2.4) 5(0,2.4)
  silkscreen extent -0.92,-0.23 2.35,1.54
SOT-23-6 [mm] "SOT-23-6"
  oct 0.6x1 smd: 1(0,0)
  rect 0.6x1 smd: 2(0.95,0) 3(1.9,0) 5(0.95,2.4) 6(0,2.4)
  rect 0.6x1.04 smd: 4(1.9,2.4)
  silkscreen extent -0.93,-0.38 2.45,1.49
SW1 [mm]
  rect 1.75x1.9 hole 1.4: 0(-4.5,0) 0(4.5,0)
  oval 1.321x1.524 hole 1.016: 1(0,0) 2(-2,0) 3(2,0)
  silkscreen extent -4.51,-2.31 4.5,2.29
TESTPOINT1 [mm]
  round 1.5 smd: 1(0,0)
  silkscreen extent -1,-1 1,1
TESTPOINT2 [mm]
  round 1 smd: 1(0,0)
  silkscreen extent -0.7,-0.7 0.7,0.7
TSOP-54 [mil]
  rect 17x75 smd: 1(0,0) 2(-31.5,0) 3(-62.99,0) 4(-94.49,0) 5(-125.98,0) 6(-157.48,0) 7(-188.98,0) 8(-220.47,0) 9(-251.97,0) 10(-283.46,0) 11(-314.99,0) 12(-346.46,0) 13(-377.95,0) 14(-409.45,0) 15(-440.94,0) 16(-472.44,0) 17(-503.94,0) 18(-535.43,0) 19(-566.93,0) 20(-598.43,0) 21(-629.92,0) 22(-661.42,0) 23(-692.91,0) 24(-724.41,0) 25(-755.91,0) 26(-787.4,0) 27(-818.9,0) 28(-818.9,-460) 29(-787.4,-460) 30(-755.91,-460) 31(-724.41,-460) 32(-692.91,-460) 33(-661.42,-460) 34(-630,-460) 35(-598.43,-460) 36(-566.93,-460) 37(-535.43,-460) 38(-503.94,-460) 39(-472.44,-460) 40(-440.94,-460) 41(-409.45,-460) 42(-377.95,-460) 43(-346.46,-460) 44(-314.99,-460) 45(-283.46,-460) 46(-251.97,-460) 47(-220.47,-460) 48(-188.98,-460) 49(-157.48,-460) 50(-125.98,-460) 51(-94.49,-460) 52(-62.99,-460) 53(-31.5,-460) 54(0,-460)
  silkscreen extent -852,-460 40,0
TSSOP20 [mm]
  rect 0.4x1.2 smd mask+0.05: 1(0,-0.003)
  oval 0.4x1.2 smd mask+0.05: 2(0.65,-0.003) 3(1.3,-0.003) 4(1.951,-0.003) 5(2.601,-0.003) 6(3.251,-0.003) 7(3.899,-0.003) 8(4.549,-0.003) 9(5.199,-0.003) 10(5.85,-0.003) 11(5.85,5.997) 12(5.199,5.997) 13(4.549,5.997) 14(3.899,5.997) 15(3.251,5.997) 16(2.601,5.997) 17(1.951,5.997) 18(1.3,5.997) 19(0.65,5.997) 20(0,5.997)
  silkscreen extent -0.32,1.2 6.14,4.79
TSSOP-10_L3.0-W3.0-P0.50-LS4.9-BL [mm]
  rect 1x0.3 smd mask+0.051: 1(-2.3,1) 2(-2.3,0.5) 3(-2.3,0) 4(-2.3,-0.5) 5(-2.3,-1) 6(2.3,-1) 7(2.3,-0.5) 8(2.3,0) 9(2.3,0.5) 10(2.3,1)
  silkscreen extent -3.37,-1.5 1.5,1.5
TYPE-C-Receptacle-2.0 [mm]
  oval 1x1.6 hole 0.6 slot 1.2 at 90 deg: 0(-4.32,-5.15) 0(4.32,-5.15)
  oval 1x2.1 hole 0.6 slot 1.7 at 90 deg: 0(-4.32,-0.97) 0(4.32,-0.97)
  rect 0.6x1.75 smd mask+0.051: A1(-3.225,0) A4(-2.45,0) B1(3.225,0) B4(2.45,0)
  rect 0.3x1.75 smd mask+0.051: A5(-1.25,0) A6(-0.25,0) A7(0.25,0) A8(1.25,0) B5(1.75,0) B6(0.75,0) B7(-0.75,0) B8(-1.75,0)
  Keep-Out Layer circle w0.1: c-2.89,-1.5 r0.325
  Keep-Out Layer circle w0.1: c2.89,-1.5 r0.325
  silkscreen extent -4.32,-7.75 4.32,-2.55
USB3.0-A-Receptacle [mm]
  round 3.5 hole 2.4: 0(-3.07,-2) 0(10.07,-2)
  round 1.2 hole 0.6: 1(0,0) 2(2.5,0) 3(4.5,0) 4(7,0) 5(7.5,1.5) 6(5.5,1.5) 7(3.5,1.5) 8(1.5,1.5) 9(-0.5,1.5)
  silkscreen extent -3.14,-14.04 10.07,2.85
WFBGA-153-11.5x13x0.8mm [mm]
  round 0.3 smd mask+0.051: A1(0,0) A3(1,0) A4(1.5,0) A5(2,0) A6(2.5,0) A8(3.5,0) A9(4,0) A10(4.5,0) A11(5,0) A12(5.5,0) A13(6,0) A14(6.5,0) B2(0.5,-0.5) B3(1,-0.5) B4(1.5,-0.5) B5(2,-0.5) B6(2.5,-0.5) B8(3.5,-0.5) B9(4,-0.5) B10(4.5,-0.5) B11(5,-0.5) B12(5.5,-0.5) B13(6,-0.5) B14(6.5,-0.5) C2(0.5,-1) C4(1.5,-1) C6(2.5,-1) C8(3.5,-1) C9(4,-1) C10(4.5,-1) C11(5,-1) C12(5.5,-1) C13(6,-1) C14(6.5,-1) D1(0,-1.5) D2(0.5,-1.5) D12(5.5,-1.5) D13(6,-1.5) D14(6.5,-1.5) E1(0,-2) E2(0.5,-2) E3(1,-2) E5(2,-2) E6(2.5,-2) E7(3,-2) E8(3.5,-2) E9(4,-2) E10(4.5,-2) E12(5.5,-2) E13(6,-2) E14(6.5,-2) F1(0,-2.5) F2(0.5,-2.5) F3(1,-2.5) F5(2,-2.5) F10(4.5,-2.5) F12(5.5,-2.5) F13(6,-2.5) F14(6.5,-2.5) G1(0,-3) G2(0.5,-3) G3(1,-3) G5(2,-3) G10(4.5,-3) G12(5.5,-3) G13(6,-3) G14(6.5,-3) H1(0,-3.5) H2(0.5,-3.5) H3(1,-3.5) H5(2,-3.5) H10(4.5,-3.5) H12(5.5,-3.5) H13(6,-3.5) H14(6.5,-3.5) J1(0,-4) J2(0.5,-4) J3(1,-4) J5(2,-4) J10(4.5,-4) J12(5.5,-4) J13(6,-4) J14(6.5,-4) K1(0,-4.5) K2(0.5,-4.5) K3(1,-4.5) K5(2,-4.5) K6(2.5,-4.5) K7(3,-4.5) K8(3.5,-4.5) K9(4,-4.5) K10(4.5,-4.5) K12(5.5,-4.5) K13(6,-4.5) K14(6.5,-4.5) L1(0,-5) L2(0.5,-5) L3(1,-5) L12(5.5,-5) L13(6,-5) L14(6.5,-5) M1(0,-5.5) M2(0.5,-5.5) M3(1,-5.5) M4(1.5,-5.5) M5(2,-5.5) M6(2.5,-5.5) M7(3,-5.5) M8(3.5,-5.5) M9(4,-5.5) M10(4.5,-5.5) M11(5,-5.5) M12(5.5,-5.5) M13(6,-5.5) M14(6.5,-5.5) N2(0.5,-6) N3(1,-6) N4(1.5,-6) N5(2,-6) N6(2.5,-6) N7(3,-6) N8(3.5,-6) N9(4,-6) N10(4.5,-6) N11(5,-6) N12(5.5,-6) N13(6,-6) N14(6.5,-6) P1(0,-6.5) P2(0.5,-6.5) P3(1,-6.5) P4(1.5,-6.5) P5(2,-6.5) P6(2.5,-6.5) P7(3,-6.5) P8(3.5,-6.5) P9(4,-6.5) P10(4.5,-6.5) P11(5,-6.5) P12(5.5,-6.5) P13(6,-6.5) P14(6.5,-6.5)
  silkscreen extent -2.5,-9.75 9,3.25
XT3225 [mm]
  oct 1.3x1.1 smd: 1(0,0)
  rect 1.3x1.1 smd: 2(2.3,0) 3(2.3,1.9) 4(0,1.9)
  silkscreen extent -1.02,-0.8 3.27,2.74
贴片按键 [mm]
  rect 1x2 smd: 1(0,0) 2(4.242,0)
  silkscreen extent 0.69,-1.45 3.55,1.45

## Part data
C1 C2 C3 C4 C5 C6 C7 C8 C9 C10 C11 C12 C13 C14 C15 C16 C22 C23 C24 C25 C26 C27 C28 C29 C33 C34 C35 C36 C37 C38 C39 C40 C41 C42 C43 C44 C45 C46 C47 C56 C57 C58 C59 C60 C61 C62 C63 C64 C65 C67 C69 C70 C71 C72 C73 C74 C75 C76 C77 C78 C79 C80 C81 C82: library part CAP, "Capacitor"
C17 C18 C19 C20 C21 C30 C31 C32 C48 C49 C50 C51 C52 C53 C54 C55: library part Cap, "Capacitor"
C66 C68: library part "CAPACITOR POL", "3.3uF"
D1 D2: library part D0603, "Typical RED, GREEN, YELLOW, AMBER GaAs LED"
D3: library part LED0, "Typical INFRARED GaAs LED"
D4 D5: library part Diode, "Default Diode"
F1: library part FUSE1, "Fuse"
IAP1 VBAT1: "测试点"
IAP2: library part Testpoint, "测试点"
J1: library part "Phone Jack"
L1 L2: library part INDUCTOR
LCD1: library part MY-RGB
P1: "Header, 4-Pin"
P2: "Header, 2-Pin"
P3: library part "HEADER 2", "Header, 2-Pin"
P4 P6: "Header, 5-Pin, Dual row"
P5: "Header, 3-Pin"
P8: library part POWER_JACK
P9: library part "Header 2", "Header, 2-Pin"
P10 P11: library part TYPE-C1
P12: library part "HEADER 9x2", "Header, 9-Pin, Dual row"
P14: library part 接线端子, "接线端子 2脚"
P15 P16 P17 P18: library part PAD, "焊盘"
P19: library part "HEADER 3", "Header, 3-Pin"
P20 P21: "Header, 2-Pin, Dual row"
R1 R2 R3 R4 R5 R6 R7 R8 R9 R10 R11 R12 R13 R14 R15 R16 R17 R18 R19 R20 R21 R22 R23 R24 R25 R26 R27 R28 R29 R30 R31 R32 R33 R34 R35 R36 R37 R38 R39 R40 R41 R42 R43 R44 R45 R46 R47 R48 R49 R50 R51 R52 R53 R54 R55 R56 R57 R58 R59 R60 R61 R62 R63 R64 R65 R66 R67 R68 R69 R70 R71 R72 R73 R74 R75 R76 R77 R79 R80 R87 R92 R93 R94 R95 R96 R97 R98 R99 R100 R101 R102 R103 R104 R105 R108 R109 R110 R111 R112 R113 R114 R115 R116 R117 R118 R119 R120 R121 R122 R123 R124 R125 R126 R127 R128: library part RES
R78 R88 R89 R90 R91: library part Res2, "Resistor"
R81 R82 R83 R84: library part R0603, "Resistor"
R85 R86: library part R
R106 R107: library part Res1, "Resistor"
S1 S2: library part KEY1
S4: "SPDT Subminiature Toggle Switch, Right Angle Mounting, Vertical Actuation"
U1: library part CH32H417QET6, "RISC-V FPU HD-MCU, 384MHz, USB3.0 & PD, 100M Ethernet, DVP, SDMMC, QSPI, OPA, ADC, DAC"
U2: "RISC-V FPU HD-MCU, 144MHz, USB_480M, CAN, UART*2, SPI"
U3: library part 8503AM
U4: "Step-Down DC-DC Converter, 5V input, 1.23V * 700mA output, with LDO 3.3V * 160mA"
U5: library part CH213E, "Ideal Diode 5V*1A"
U6 U7: library part W25Q64
U8 U9: library part MP34DT06JTR
U10: library part KLM8G1GETF-B041
U11: library part ICM-42688-P
U12: library part CS4344-CZZ
U13: library part W9825G6KH-6
U14: library part TJA1050, "High speed CAN transceiver"
Y1 Y2: library part XTAL, "Crystal Oscillator"

## Via types
v1: diameter 0.45, hole 0.3, Top Layer to Bottom Layer, tented both sides, 534 vias
v2: diameter 0.5, hole 0.3, Top Layer to Bottom Layer, tented both sides, 320 vias
v3: diameter 0.711, hole 0.406, Top Layer to Bottom Layer, tented both sides, 24 vias
v4: diameter 0.508, hole 0.305, Top Layer to Bottom Layer, tented both sides, 22 vias
v5: diameter 0.7, hole 0.4, Top Layer to Bottom Layer, tented both sides, 3 vias

## Nets (pads, with @x,y where several pads share a name; then routed paths per layer and width w, separated by ;. In a path a pad name is that pad's centre, name@x,y a point inside that pad or via, vN(x,y) a via of type N, cw(c..) or ccw(c..) an arc to the next point about the centre after c; other vN are vias at no path point)
1V2: C36.2 C37.2 L2.2 R27.2 R29.2 U4.6 | length 34.6
  Top Layer w0.508: L2.2@18.856,23.299 19.085,23.528 21.852,23.528 22.149,23.23 C37.2@22.149,21.968 ; U4.6@19.34,18.033 21.942,18.033 22.24,18.331 C36.2@22.24,20.444 ; C37.2@22.24,21.968 C36.2@22.24,20.444 ; v2(22.937,20.441) 22.933,20.444 C36.2@22.24,20.444 ; v1(72.777,27.006) v1@72.973,27.006 ; R27.2@73.329,28.271 73.329,27.363 ; v1@73.395,26.999 73.387,27.006 v1@72.973,27.006 ; v1(73.402,27.006) 73.329,27.08 73.329,27.363 ; R29.2@82.422,37.469 v1@82.885,37.469 ; v1(82.896,37.459) v1@82.885,37.469 ; v1@83.426,37.676 83.219,37.469 v1@82.885,37.469 ; v1@72.973,27.006 73.329,27.363
  Layer 2 w0.508: v2(22.937,20.441) 22.942,20.441 25.218,18.165 35.972,18.165 ; v1@73.341,26.892 73.35,26.901 74.164,26.901 74.164,22.777
  other v1: 83.401,37.683
  other v2: 22.315,19.769 22.949,19.797 22.949,21.065
3V3: C30.1 C46.2 C47.2 C48.2 C49.1 C50.1 C58.2 C59.2 C60.2 C61.2 C62.2 C70.2 C71.2 C72.2 C73.2 C74.2 C75.2 C76.2 C81.2 C82.2 D1.1 D2.1 D3.1 LCD1.6 LCD1.7 P4.8 P5.2 P12.1 R15.2 R17.1 R20.2 R22.1 R31.2 R35.2 R37.2 R39.2 R82.2 R92.1 R93.2 R94.1 R95.2 R96.2 R106.2 R110.1 R111.1 U2.14 U6.8 U7.8 U8.1 U9.1 U10.E6 U10.F5 U10.J10 U10.K9 U11.5 U11.8 U12.9 U13.1 U13.3 U13.9 U13.14 U13.27 U13.43 U13.49 | length 448.8
  Top Layer w0.203: U10.F5@29.833,28.294 30.213,28.294 ; 30.33,28.427 30.33,28.411 30.213,28.294 ; U10.E6@30.333,28.794 30.333,28.294 ; v1@31.805,26.822 30.333,28.294 ; U10.K9@31.833,26.294 31.819,26.308 31.819,26.796 31.813,26.802 32.325,26.802 U10.J10@32.333,26.794 32.338,26.789 32.579,26.789 32.78,26.588 v1(32.821,26.588) ; U9.1@66.084,65.278 66.084,65.003 66.33,64.757 66.457,64.757 66.489,64.724 67.23,64.724 ; U8.1@66.084,70.826 66.084,70.551 66.182,70.453 66.256,70.453 66.604,70.104 68.26,70.104 C82.2@68.434,70.278 ; C47.2@68.42,65.914 68.379,65.914 68.26,65.795 68.26,65.754 67.23,64.724 ; C47.2@68.534,65.778 67.48,64.724 67.23,64.724 ; C58.2@103.217,35.642 103.222,35.647 103.222,36.918 U11.5@103.228,36.924 ; U11.8@104.978,37.174 105.656,37.174 ; C59.2@106.047,37.037 105.793,37.037 105.656,37.174 ; C59.2@106.105,37.174 105.656,37.174 ; 30.213,28.294 30.333,28.294
  Top Layer w0.305: 86.947,61.767 87.879,62.7 ; 87.242,61.767 87.879,62.405 ; 87.527,61.767 87.879,62.119 87.879,62.273 87.879,62.405 ; U12.9@87.879,63.607 87.879,62.7 ; 115.979,35.25 117.326,35.25 ; 116.089,35.498 116.341,35.75 116.945,35.75 ; 116.653,35.458 116.945,35.75 ; LCD1.6@118.999,35.25 117.326,35.25 ; LCD1.7@118.999,35.75 117.41,35.75 ; 87.879,62.405 87.879,62.7 ; 116.945,35.75 117.118,35.75 ; 117.118,35.458 117.326,35.25 ; 117.118,35.458 117.118,35.75 ; 117.118,35.458 117.41,35.75 ; 117.118,35.75 117.41,35.75
  Top Layer w0.381: C76.2@21.519,54.812 C76.2@21.524,54.807 21.561,54.845 24.038,54.845 U13.9@24.064,54.87 ; v1@21.519,57.247 v1(21.514,57.252) v1@21.519,57.257 ; C73.2@21.519,59.552 C73.2@21.524,59.557 ; C75.2@21.524,51.251 21.524,51.226 21.88,50.87 U13.14@24.064,50.87 ; C73.2@21.524,59.531 21.663,59.67 U13.3@24.064,59.67 ; C70.2@21.524,61.245 C70.2@21.524,61.208 21.561,61.245 24.038,61.245 U13.1@24.064,61.27 ; v1@21.537,39.372 21.53,39.379 21.53,40.424 C74.2@21.524,40.431 21.563,40.47 U13.27@24.064,40.47 ; C30.1@31.299,70.259 31.36,70.197 31.693,70.197 ; 31.299,70.592 31.693,70.197 ; U2.14@33.043,70.197 31.693,70.197 ; U13.43@35.748,52.47 35.773,52.445 38.11,52.445 C71.2@38.161,52.394 ; U13.49@35.748,57.27 35.761,57.283 38.148,57.283 C72.2@38.161,57.296 ; R96.2@68.453,72.009 68.453,70.242 70.573,70.242 70.727,70.087 70.727,66.345 ; C47.2@68.483,65.994 C46.2@69.869,65.994 ; C59.2@106.304,36.972 C59.2@106.304,37.175 106.304,37.801 106.527,38.024 106.93,38.024 107.154,38.247 R111.1@107.154,38.944 ; C46.2@69.869,65.994 70.376,65.994 v1@70.452,66.07 ; C46.2@69.869,65.994 69.978,65.884 70.119,65.884 v1(70.452,65.551) v1@70.452,65.57 ; v1@70.452,65.57 70.727,65.845 70.727,66.345 ; v1@70.452,65.57 v1@70.452,66.07 ; v1@70.452,66.07 70.727,66.345
  Top Layer w0.508: D3.1@12.567,45.845 12.567,46.917 12.864,47.215 18.036,47.215 18.446,46.805 18.446,44.335 18.743,44.037 v5(21.388,44.037) ; C76.2@21.519,54.812 v1@21.519,57.247 ; v1@21.519,57.257 C73.2@21.519,59.552 ; C75.2@21.524,51.251 C76.2@21.524,54.807 ; C73.2@21.524,59.557 C70.2@21.524,61.208 ; v1@21.901,25.761 22.459,25.761 R106.2@23.173,25.761 ; v1(31.293,70.93) v1@31.299,70.924 ; v1(31.293,71.477) 31.299,71.471 v1@31.299,70.924 ; C30.1@31.299,70.259 31.299,70.592 v1@31.299,70.924 ; C50.1@31.485,35.466 C49.1@32.899,35.466 C48.2@34.312,35.466 v1@34.932,35.466 ; v1(34.939,35.458) v1@34.932,35.466 ; v1(35.498,35.458) 35.49,35.466 v1@34.932,35.466 ; C71.2@38.161,52.394 v1(38.161,56.279) C72.2@38.161,57.296 v1(38.161,58.021) ; R82.2@41.549,72.519 v1(41.549,74.306) v1@41.549,74.881 ; v5(48.431,66.841) D2.1@48.431,67.875 D1.1@48.431,69.655 ; v1@56.732,34.237 56.526,34.237 v1(56.287,33.998) 56.488,33.797 56.827,33.797 56.873,33.751 R35.2@56.873,33.726 ; v1(56.782,34.296) 56.906,34.172 R35.2@56.906,33.889 ; v1(58.005,49.817) v1(58.005,49.286) 58.074,49.286 58.554,49.766 R31.2@58.554,49.791 v1@58.01,49.791 ; v1(73.285,50.824) v1(73.858,50.824) 74.009,50.672 R39.2@74.412,50.672 R37.2@75.582,50.672 ; v1(85.403,65.417) v1(85.403,64.822) 85.403,62.065 85.701,61.767 86.947,61.767 87.242,61.767 87.527,61.767 88.385,61.767 ; 87.879,62.273 88.385,61.767 ; R94.1@95.162,46.304 95.162,45.306 95.459,45.009 95.729,45.009 ; R92.1@95.162,53.845 95.162,52.825 95.459,52.527 U6.8@98.323,52.527 98.323,51 98.849,50.474 107.624,50.474 ; U7.8@98.323,45.009 96.504,45.009 ; C59.2@106.304,36.972 C60.2@106.304,35.905 106.304,34.825 105.711,34.232 103.514,34.232 103.217,34.53 103.217,35.277 ; R111.1@107.154,38.944 108.25,38.944 112.053,35.14 115.869,35.14 ; R15.2@115.228,51.867 R17.1@115.228,52.809 ; R17.1@115.228,52.996 108.753,52.996 ; 116.814,35.246 116.709,35.14 115.869,35.14 ; 117.118,35.458 116.653,35.458 116.187,35.458 115.979,35.25 115.869,35.14 ; 88.385,61.767 90.144,60.008 C61.2@91.166,60.008 C62.2@92.374,60.008 106.998,60.008 108.165,58.84 R93.2@108.165,55.143 108.165,53.571 ; 95.729,45.009 96.206,44.532 ; 95.729,45.009 96.504,45.009 ; 96.206,44.532 96.206,43.585 96.645,43.147 99.582,43.147 99.962,42.767 99.962,42.024 ; 96.206,44.532 96.206,44.711 96.504,45.009 ; 99.962,41.281 100.259,41.578 100.407,41.578 ; 99.962,41.281 R110.1@99.962,38.635 99.962,36.349 100.669,35.642 102.852,35.642 ; 99.962,41.281 99.962,42.024 ; 99.962,42.024 100.407,41.578 ; 100.407,41.578 R22.1@103.638,41.578 104.5,41.578 108.92,45.998 108.92,47.2 108.622,47.498 R95.2@108.165,47.498 108.165,49.952 ; 102.852,35.642 C58.2@103.217,35.642 103.217,35.277 ; 102.852,35.642 103.217,35.277 ; 107.624,50.474 108.165,51.015 ; 107.624,50.474 107.643,50.474 ; 107.643,50.474 108.165,49.952 ; 107.643,50.474 108.165,50.474 ; 108.165,49.952 108.165,50.474 ; 108.165,50.474 108.165,51.015 ; 108.165,51.015 108.165,52.408 ; 108.165,52.408 108.753,52.996 ; 108.165,52.408 108.165,52.996 ; 108.165,52.996 108.74,52.996 ; 108.165,52.996 108.165,53.571 ; 108.165,53.571 108.74,52.996 ; 108.74,52.996 108.753,52.996
  Layer 2 w0.381: v1(21.514,57.252) 21.533,57.252 21.575,57.21 33.067,57.21 33.878,58.021 v1(38.161,58.021) 40.767,60.627 48.261,60.627 56.791,60.627
  Layer 2 w0.508: v1(31.293,70.93) 41.493,70.93 ; 41.549,75.166 v1(41.549,74.912) v1(41.549,74.306) 41.549,67.322 41.847,67.024 ; 48.261,60.627 48.431,60.797 ; v1(56.287,33.998) 56.287,33.57 55.269,32.552 50.962,32.552 49.921,33.593 49.921,46.763 50.218,47.061 55.463,47.061 56.791,48.389 56.791,49.791 ; 56.791,60.436 56.791,49.791 ; v1@58.01,49.791 56.791,49.791 ; 61.722,65.368 61.722,77.367 64.215,79.86 ; 69.419,65.151 69.685,65.417 74.928,65.417 ; 74.92,65.426 74.928,65.417 ; v1(85.403,65.417) 74.928,65.417
  Layer 2 w0.762: v5@21.398,44.047 21.398,57.136 v1(21.514,57.252) ; v5@21.406,44.037 21.406,39.503 21.537,39.372 31.068,39.372 34.939,35.501 v1(34.939,35.458) 35.063,35.334 35.063,28.83 v1(32.821,26.588) 32.027,26.588 v1(31.805,26.81)
  Bottom Layer w0.508: v1@22.437,25.783 v1(22.458,25.762) ; v2@24.399,21.702 24.399,18.32 20.864,14.784 20.864,5.833 21.161,5.535 25.875,5.535 26.173,5.238 P5.2@26.173,2.609 P5.2@26.173,2.517 ; v1@57.987,49.298 58.48,49.791 ; v1@58.01,49.791 58.48,49.791 ; 58.867,49.791 58.48,49.791 ; v1(73.858,50.824) v1(73.285,50.824) 71.057,50.824 68.966,52.915 60.32,52.915 59.675,52.27 59.675,50.089 59.378,49.791 58.48,49.791
  other v1: 21.9,25.762 21.863,26.34 22.42,26.34 22.261,39.268 21.537,39.321 22.246,39.789 21.522,39.843 21.514,56.705 70.452,66.095
  other v2: 24.145,21.137 24.804,21.138 24.171,21.78 24.829,21.78
5V: C31.2 C32.2 C38.2 C39.2 F1.1 LCD1.1 LCD1.2 P4.10 U3.1 U3.4 U4.4 U14.3 | length 159.7
  Top Layer w0.305: v1@115.377,30.701 115.128,30.95 115.128,32.687 115.463,33.022 117.239,33.022 ; 116.968,32.75 117.239,33.022 ; 117.292,32.75 117.295,32.75 117.616,33.072 ; 117.616,32.75 117.616,33.072 ; 117.91,32.795 117.91,33.007 LCD1.2@118.019,33.116 ; LCD1.1@118.026,32.772 118.026,33.109 LCD1.2@118.019,33.116 ; LCD1.2@118.999,33.25 LCD1.2@118.154,33.25 ; 117.239,33.022 117.468,33.25 117.795,33.25 ; 117.616,33.072 117.795,33.25 ; 117.795,33.25 LCD1.2@118.154,33.25 ; LCD1.2@118.019,33.116 LCD1.2@118.154,33.25
  Top Layer w0.508: v2(12.578,24.921) 12.578,18.454 12.876,18.157 C38.2@14.392,18.157 14.392,16.901 ; F1.1@14.339,49.251 16.615,49.251 16.913,49.549 v1@16.913,50.009 ; C38.2@14.392,18.207 15.547,18.207 15.616,18.277 15.865,18.277 C39.2@15.916,18.327 ; C39.2@15.916,18.323 15.941,18.323 16.23,18.033 U4.4@17.44,18.033 ; C32.2@23.946,14.7 C32.2@24.031,14.786 ; U3.4@24.031,11.459 24.031,12.261 ; C32.2@24.031,14.829 C32.2@24.031,14.786 ; 24.089,12.318 24.031,12.261 ; C32.2@24.157,14.936 24.157,14.911 C32.2@24.031,14.786 ; U3.1@26.431,9.559 v1(27.459,9.559) ; U14.3@54.508,17.856 54.508,16.021 54.113,15.625 52.329,15.625 52.003,15.299 52.003,11.32 52.003,11.297 ; v1@115.431,30.77 v1(115.431,30.795) v1(115.431,31.313) 115.431,32.453 115.728,32.75 116.042,32.75 ; 115.463,32.171 116.042,32.75 ; v1@115.549,30.748 115.654,30.853 115.654,31.83 115.654,32.023 116.074,32.442 118.294,32.442 LCD1.1@118.602,32.75 ; 117.292,32.75 116.968,32.75 116.042,32.75 ; 117.295,32.75 117.616,32.75 LCD1.1@118.602,32.75 ; LCD1.1@118.999,32.75 LCD1.1@118.602,32.75 ; 24.031,12.261 C32.2@24.031,14.786 ; 52.003,11.297 v1(52.003,10.737) v1(51.443,10.737) 52.003,11.297
  Layer 2 w0.508: 16.913,29.256 16.913,49.319 16.913,49.667 16.913,54.841 ; 31.395,4.715 50.372,4.715 52.623,6.966 ; P4.10@34.983,79.778 P4.10@35.195,79.778 ; 82.322,2.977 112.114,2.977 ; 115.431,6.293 v1(115.431,30.795) v1@115.431,31.272
  Bottom Layer w0.508: 23.439,12.435 23.439,10.546 24.425,9.559 v1(27.459,9.559)
  other v1: 22.869,11.599 22.297,12.18 22.869,12.18 23.442,12.18 115.432,31.83 17.08,48.629 16.463,48.937 17.08,49.319 16.463,49.667 17.08,50.009
  other v2: 13.157,24.091 12.585,24.359 13.157,24.663
5V_IN: P9.1 U5.3 | length 8.3
  Top Layer w0.762: P9.1@11.525,2.776 11.455,2.846 11.455,4.995 11.901,5.441 U5.3@17.286,5.441
AOUTL: C66.1 R121.1 U12.7 | length 15.3
  Top Layer w0.152: U12.7@88.835,63.884 88.835,64.572 89.79,65.528 95.37,65.528 97.735,63.162 C66.1@102.111,63.162
AOUTR: C68.1 R124.1 U12.10 | length 12.2
  Top Layer w0.152: U12.10@87.379,63.607 87.379,65.71 88.888,67.219 C68.1@96.892,67.219
CAN1_RX: R77.1 U14.4 | length 20.3
  Top Layer w0.203: U14.4@53.238,17.856 53.238,19.987 53.879,20.627 64.779,20.627 67.623,23.472 R77.1@67.623,25.807
CAN1_TX: R80.1 U14.1 | length 17.2
  Top Layer w0.203: U14.1@57.048,17.856 57.048,19.454 57.744,20.15 65.049,20.15 68.958,24.059 R80.1@68.958,25.807
CANH: P14.2 R128.1 U14.7 | length 12.6
  Top Layer w0.203: U14.7@55.778,12.268 55.778,10.502 55.774,10.498 55.774,10.383 55.575,10.185 R128.1@55.575,10.16 55.575,9.624 55.291,9.34 55.291,8.072 55.88,7.483 58.165,7.483 58.902,6.746 58.902,5.969 P14.2@61.214,3.658
CANL: P14.1 R128.2 U14.6 | length 12.5
  Top Layer w0.203: U14.6@54.508,12.268 54.591,12.185 R128.2@54.591,10.243 ; R128.2@54.642,10.243 R128.2@54.725,10.16 54.725,9.548 54.958,9.315 54.958,8.199 54.96,8.197 54.96,7.935 55.792,7.103 58.008,7.103 58.523,6.589 58.523,6.047 P14.1@56.134,3.658
CC1: P10.A5 R51.1 R90.1 | length 41.8
  Top Layer w0.203: v1(37.91,10.614) 37.933,10.59 38.635,10.59 R90.1@38.659,10.566 38.684,10.566 38.882,10.368 38.882,10.343 39.138,10.087 P10.A5@39.138,7.792 ; v1(47.387,21.666) 48.375,22.654 64.126,22.654 64.953,23.481 R51.1@64.953,25.807
  Bottom Layer w0.203: v1(37.91,10.614) 41.408,10.614 42.628,11.833 42.628,17.525 46.769,21.666 v1(47.387,21.666)
CC2: P10.B5 R53.1 R91.1 | length 38.7
  Top Layer w0.203: P10.B5@42.138,7.792 42.138,9.411 41.707,9.842 R91.1@41.707,10.566 v1(42.331,10.566) ; v1(48.076,21.103) 49.09,22.117 64.966,22.117 66.288,23.439 R53.1@66.288,25.807
  Bottom Layer w0.203: v1(42.331,10.566) 43.157,11.393 43.157,17.283 46.978,21.103 v1(48.076,21.103)
CLK: P7.3 P20.2 U1.120 | length 48.5
  Top Layer w0.13: U1.120@69.241,33.792 69.247,33.786 69.247,33.401 69.39,33.258 69.39,31.505 70.256,30.638 70.256,17.278 67.782,14.804 65.932,14.804 P20.2@64.79,15.946 64.79,15.591 64.004,14.804 63.632,14.804 63.408,14.58 63.333,14.505 63.333,11.053 63.408,10.978 65.347,9.039 75.324,9.039 76.979,10.695 76.979,13.173 77.802,13.995 P7.3@77.851,13.995
D_SWCLK: P4.2 P20.1 U2.6 U2.15 | length 140.4
  Top Layer w0.152: U2.15@33.043,69.55 33.07,69.576 37.235,69.576 v1(37.262,69.603) 37.288,69.576 39.017,69.576 U2.6@39.044,69.55
  Bottom Layer w0.254: P4.2@45.225,79.819 45.225,76.156 41.682,72.612 37.936,72.612 37.262,71.938 v1(37.262,69.603) 37.262,67.829 36.583,67.151 30.626,67.151 27.643,64.168 20.128,64.168 10.762,54.802 10.762,41.635 12.305,40.093 18.067,40.093 19.645,38.516 19.645,26.214 21.843,24.016 27.913,24.016 28.718,23.21 57.609,23.21 60.187,20.632 60.187,16.371 60.613,15.946 P20.1@62.25,15.946
D_SWDIO: P4.4 P20.3 R81.1 U2.13 | length 144.5
  Top Layer w0.152: U2.13@33.043,70.848 36.207,70.847 36.757,71.396 R81.1@36.757,73.578 36.746,73.566 v1(36.158,73.566)
  Bottom Layer w0.254: P4.4@42.685,79.86 42.685,74.376 41.875,73.566 36.208,73.566 36.208,67.769 35.971,67.532 29.826,67.532 27.088,64.794 19.314,64.794 9.94,55.419 9.94,41.198 11.79,39.348 17.553,39.348 18.898,38.002 18.898,25.847 21.438,23.307 27.873,23.307 28.549,22.631 56.655,22.631 58.932,20.354 58.932,14.945 60.471,13.406 P20.3@62.25,13.406
DC_3V3: C33.1 C34.1 C35.1 L1.2 P5.1 R85.1 | length 12.9
  Top Layer w0.508: P5.1@23.633,2.609 23.633,4.103 24.457,4.927 R85.1@24.457,6.633 C33.1@25.705,6.633 C35.1@26.952,6.633 29.835,6.633 30.381,7.18 L1.2@30.381,9.574
DC_5V: C41.2 C42.2 C43.2 P6.7 P8.1 | length 21.4
  Top Layer w0.508: P6.7@6.459,20.157 6.555,20.253 8.816,20.253 9.433,20.871 9.433,24.738 11.897,27.202 15.263,27.202 ; P8.1@13.595,34.084 16.512,34.084 C43.2@16.88,33.716 C42.2@20.69,33.716 20.804,33.716 C42.2@20.83,33.69
DFS_CLK: U1.45 U8.3 U9.3 | length 35.3
  Top Layer w0.127: v1(63.847,58.786) 64.841,58.786 68.335,55.292 68.335,49.823 67.706,49.194 67.706,46.954 67.841,46.819 U1.45@67.841,46.092 ; v1(64.31,73.87) 64.609,73.571 64.609,72.945 64.819,72.735 64.95,72.735 65.234,72.451 U8.3@65.234,72.176
  Top Layer w0.178: v1(64.363,68.265) 64.698,67.929 64.698,67.344 65.028,67.014 65.123,67.014 65.234,66.903 U9.3@65.234,66.628
  Layer 2 w0.127: v1(63.847,58.786) 63.517,59.116 63.517,67.419 v1(64.363,68.265) 64.336,68.291 64.336,73.844 v1(64.31,73.87)
DFS_DOUT: U1.65 U8.4 U9.4 | length 34.4
  Top Layer w0.152: v1(58.04,50.739) 57.16,49.859 57.16,49.227 57.878,48.51 57.878,46.664 59.175,45.367 U1.65@60.466,45.367 ; v1(63.041,64.248) 64.366,64.248 64.85,64.731 64.962,64.731 65.234,65.003 U9.4@65.234,65.278 ; v1(63.047,69.46) 63.589,70.002 64.647,70.002 64.925,70.279 64.962,70.279 65.258,70.575 U8.4@65.258,70.721
  Layer 2 w0.152: v1(58.04,50.739) 58.04,51.578 57.864,51.753 57.864,53.864 63.041,59.042 v1(63.041,64.248) ; v1@63.044,64.251 63.044,69.457 v1(63.047,69.46)
DIO: P7.2 P20.4 U1.121 | length 48.5
  Top Layer w0.13: U1.121@69.591,33.792 69.591,33.464 69.646,33.409 69.646,31.611 70.513,30.744 70.513,17.172 67.889,14.547 65.932,14.547 P20.4@64.79,13.406 64.79,13.761 64.004,14.547 63.738,14.547 63.59,14.399 63.59,11.159 65.141,9.607 65.453,9.296 71.125,9.296 72.495,9.296 ccw(c72.495,9.551) 72.75,9.551 72.75,9.704 cw(c73.005,9.704) 73.26,9.704 73.26,9.551 ccw(c73.516,9.551) 73.516,9.296 74.091,9.296 75.218,9.296 76.723,10.801 76.723,13.173 75.9,13.995 P7.2@75.851,13.995